# EAGLE board Qwiic_Shield_for_Teensy_Extended-Panel (EAGLE 9.6.2), part 1 of 2
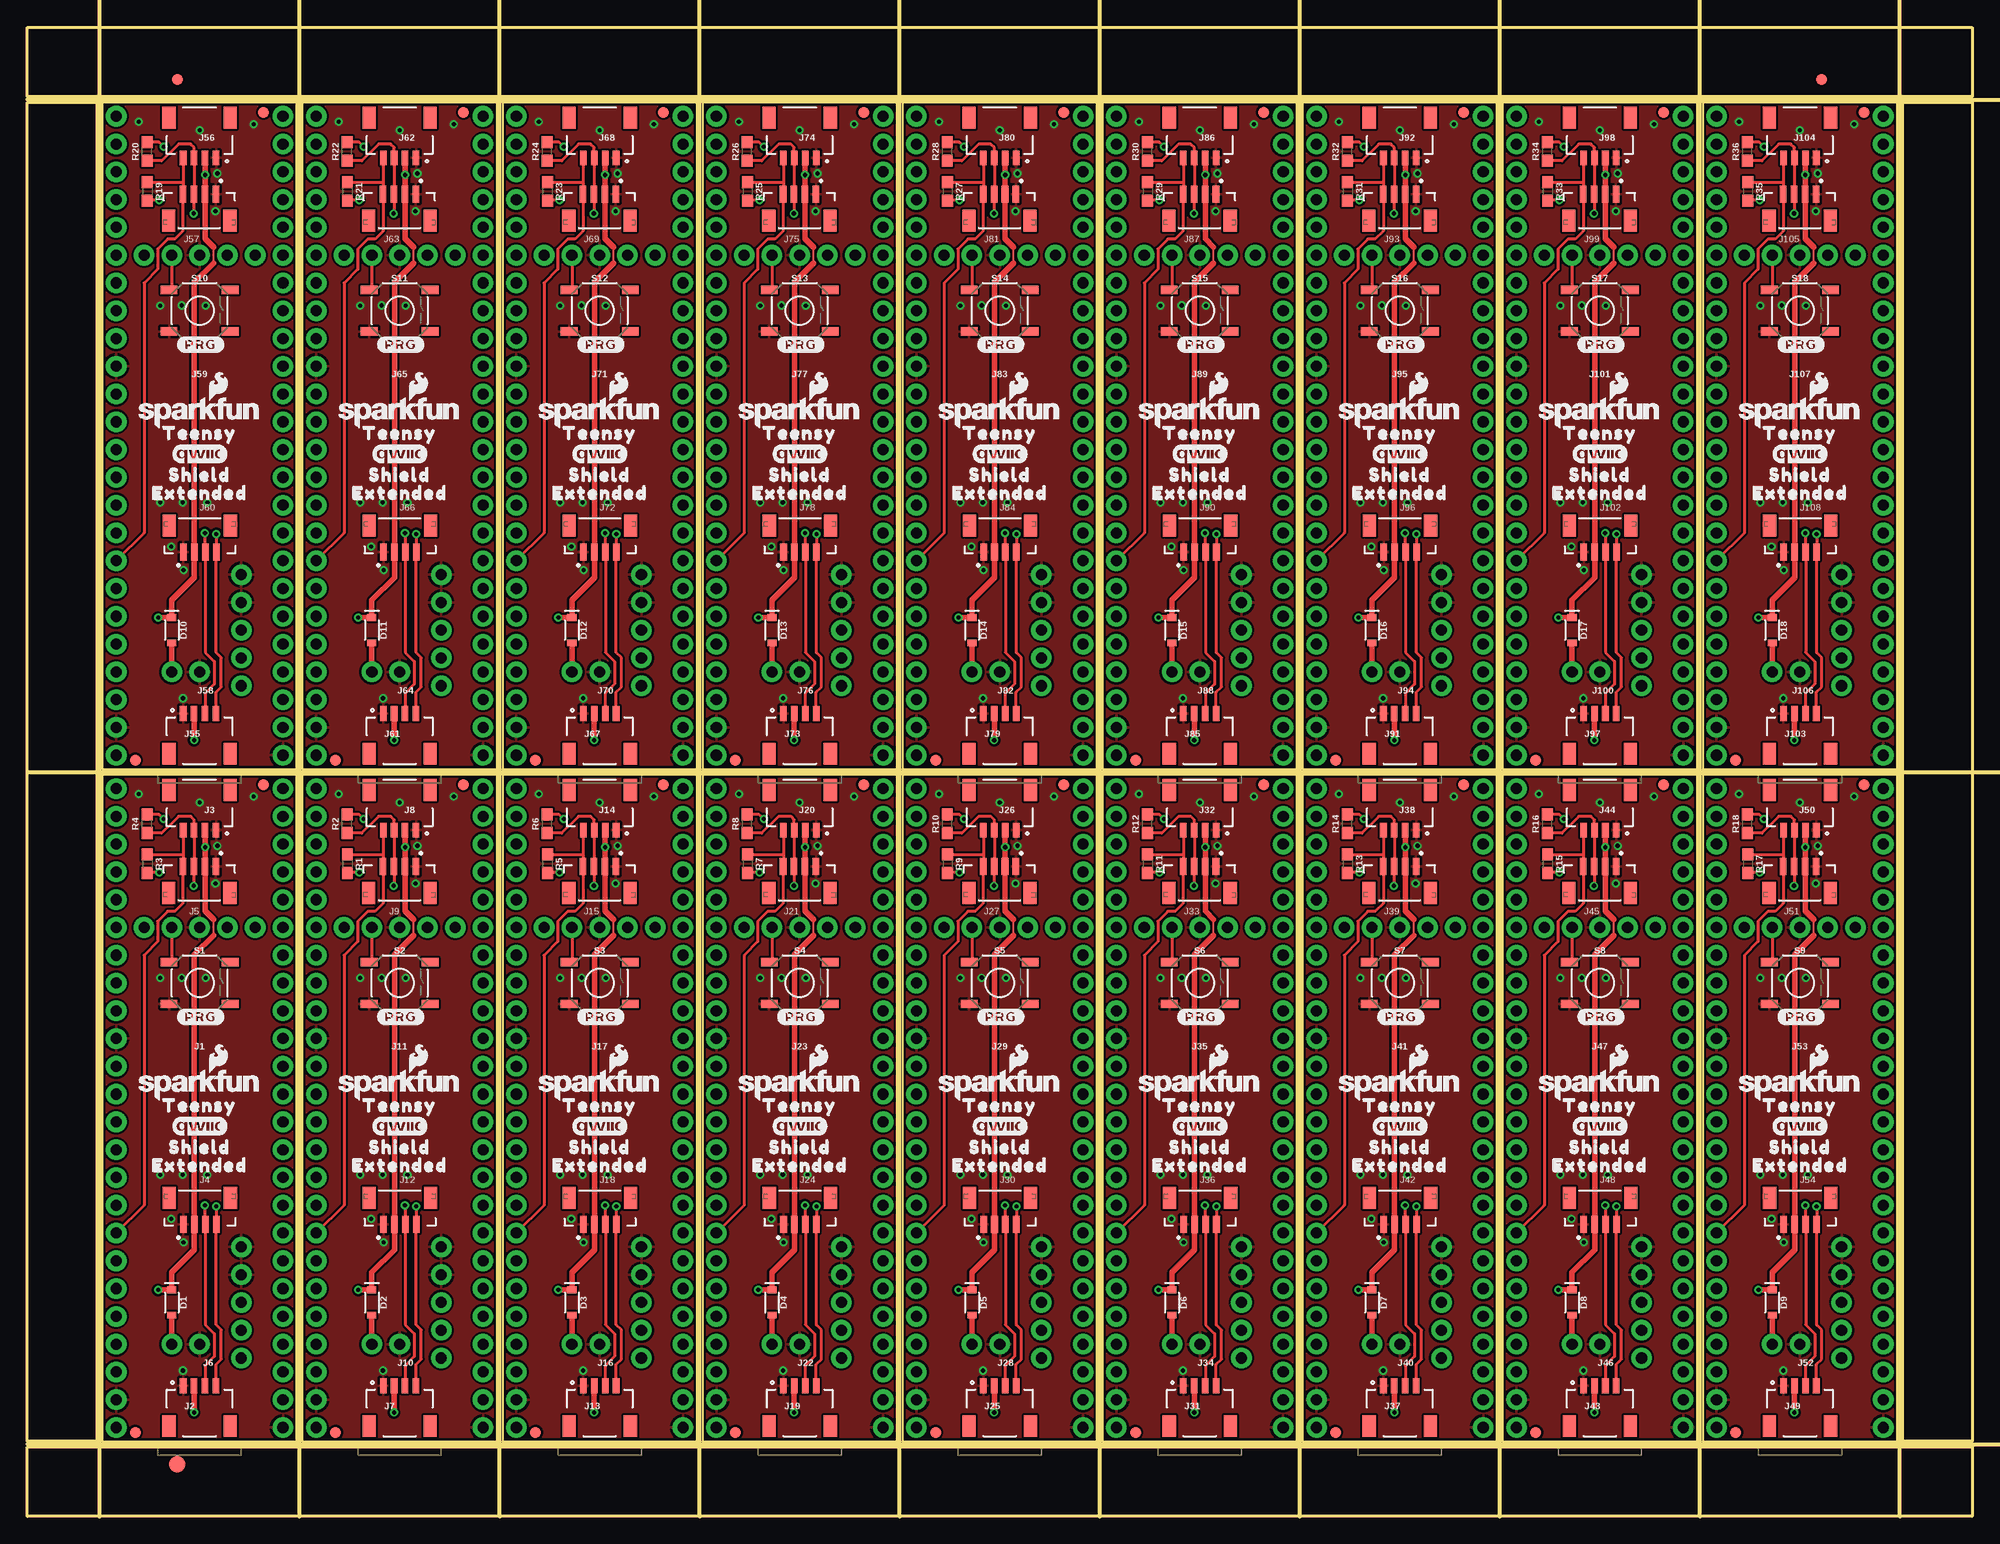
[diagram p0: board, top side]
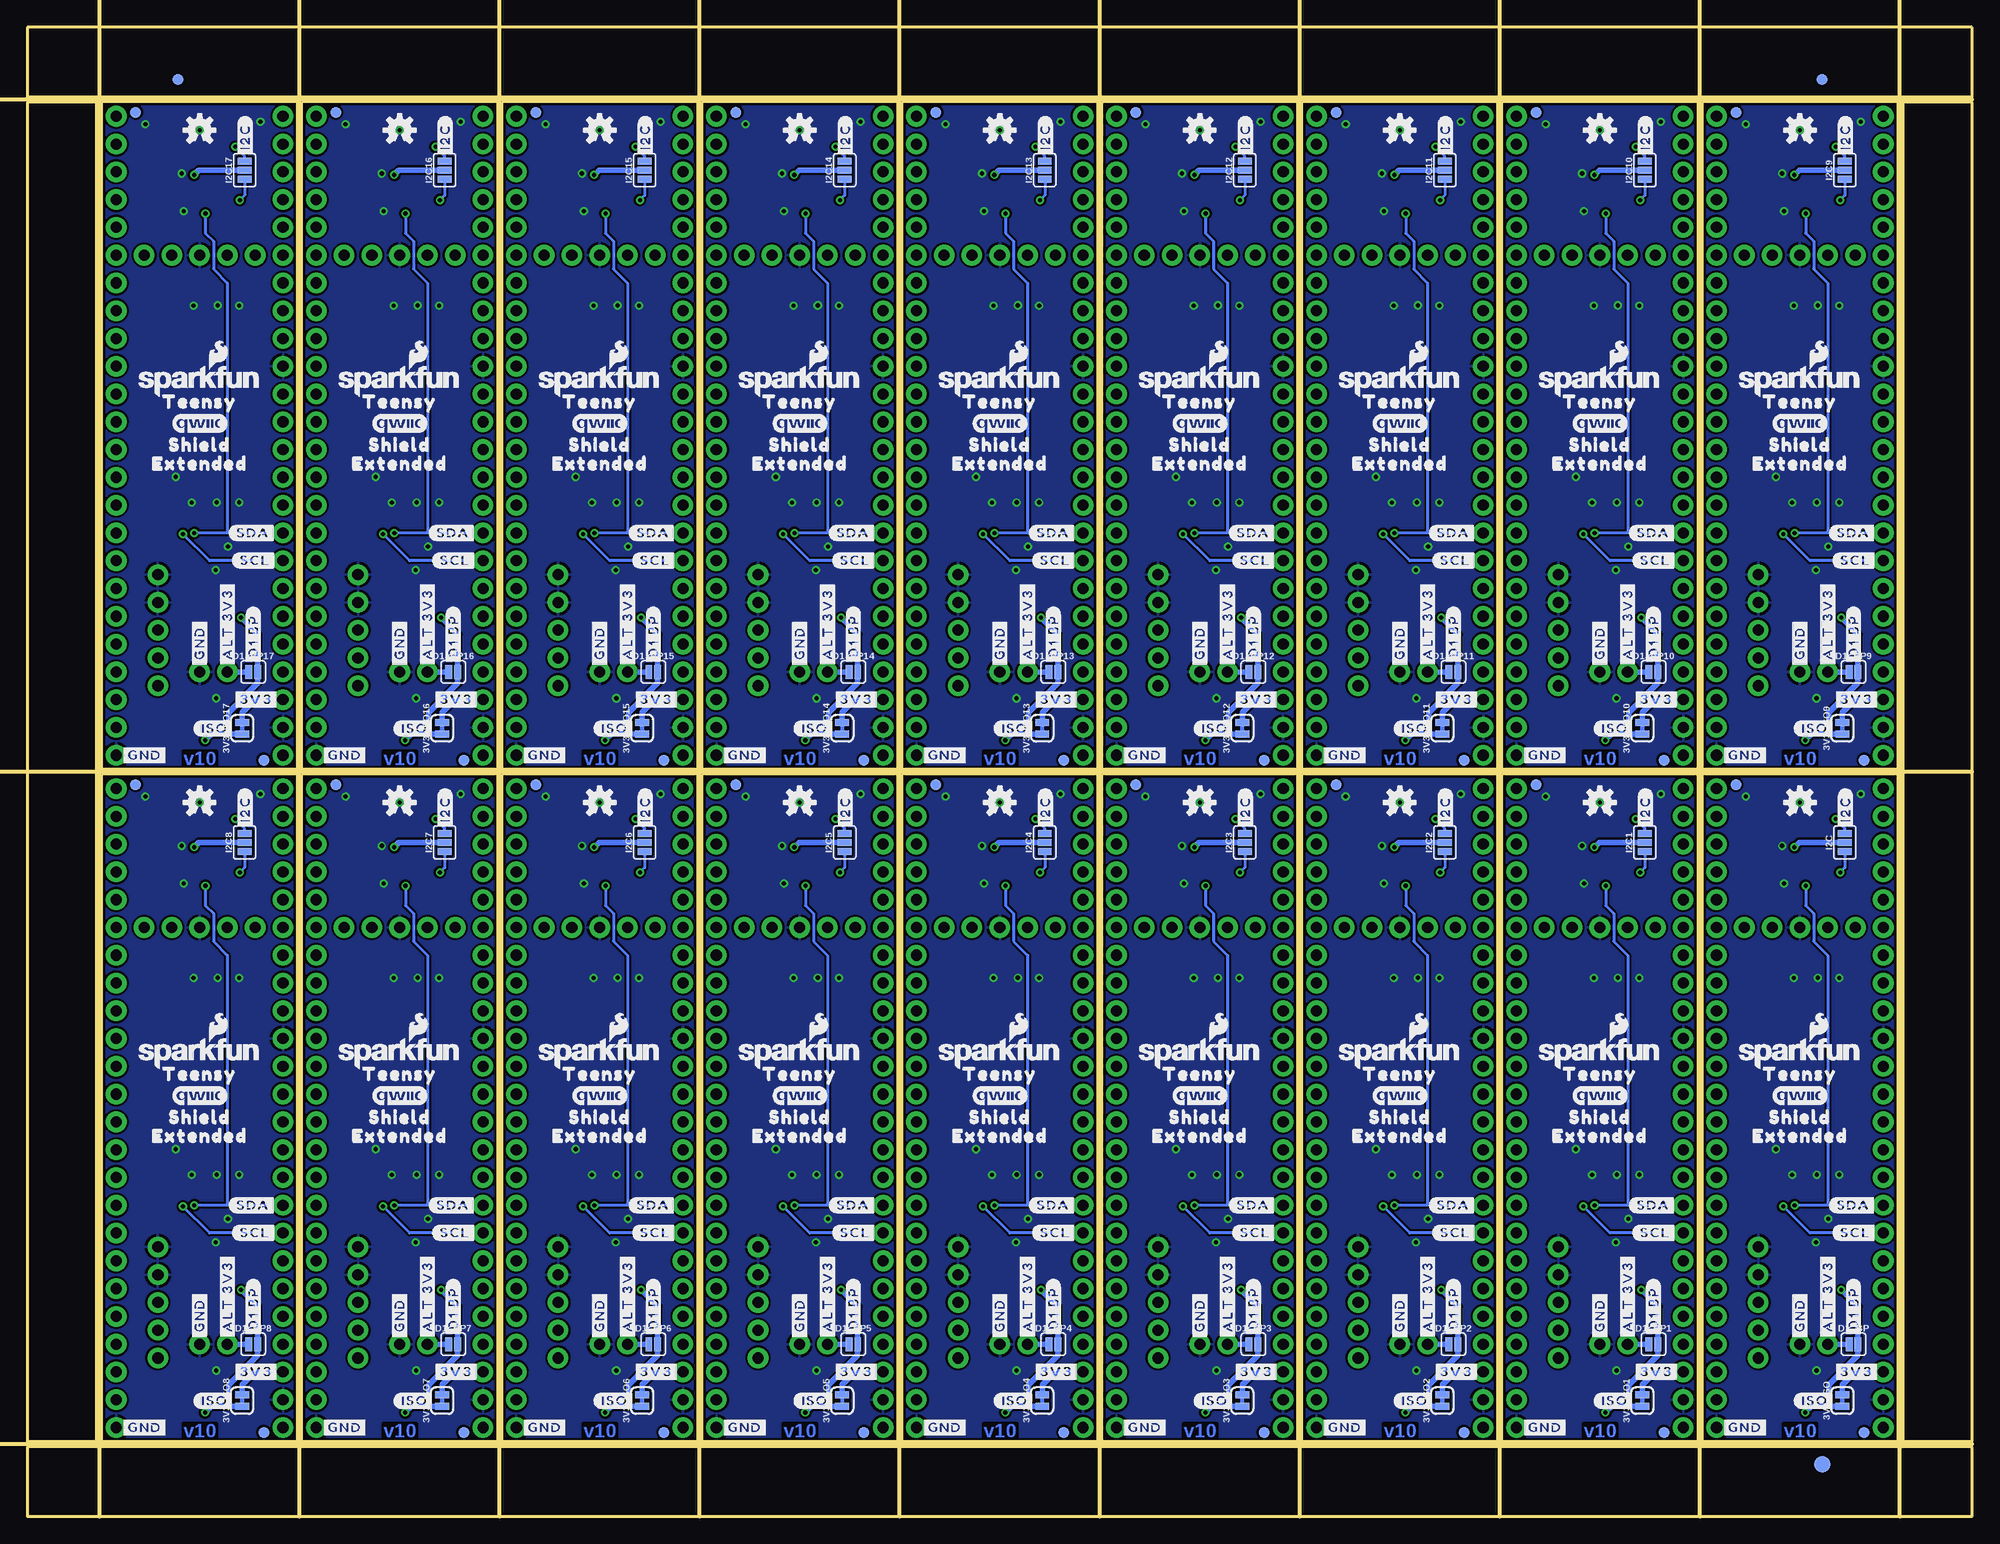
[diagram p1: board, bottom side, seen from below]

Size 177.8 x 136.14 mm. Coordinates in mm from the lower left corner, seen from the top.
Outline: 6.86,6.86 24.64,6.86 24.64,67.82 6.86,67.82 6.86,6.86
Outline: 25.15,6.86 42.93,6.86 42.93,67.82 25.15,67.82 25.15,6.86
Outline: 43.43,6.86 61.21,6.86 61.21,67.82 43.43,67.82 43.43,6.86
Outline: 61.72,6.86 79.5,6.86 79.5,67.82 61.72,67.82 61.72,6.86
Outline: 80.01,6.86 97.79,6.86 97.79,67.82 80.01,67.82 80.01,6.86
Outline: 98.3,6.86 116.08,6.86 116.08,67.82 98.3,67.82 98.3,6.86
Outline: 116.59,6.86 134.37,6.86 134.37,67.82 116.59,67.82 116.59,6.86
Outline: 134.87,6.86 152.65,6.86 152.65,67.82 134.87,67.82 134.87,6.86
Outline: 153.16,6.86 170.94,6.86 170.94,67.82 153.16,67.82 153.16,6.86
Outline: 6.86,68.33 24.64,68.33 24.64,129.29 6.86,129.29 6.86,68.33
Outline: 25.15,68.33 42.93,68.33 42.93,129.29 25.15,129.29 25.15,68.33
Outline: 43.43,68.33 61.21,68.33 61.21,129.29 43.43,129.29 43.43,68.33
Outline: 61.72,68.33 79.5,68.33 79.5,129.29 61.72,129.29 61.72,68.33
Outline: 80.01,68.33 97.79,68.33 97.79,129.29 80.01,129.29 80.01,68.33
Outline: 98.3,68.33 116.08,68.33 116.08,129.29 98.3,129.29 98.3,68.33
Outline: 116.59,68.33 134.37,68.33 134.37,129.29 116.59,129.29 116.59,68.33
Outline: 134.87,68.33 152.65,68.33 152.65,129.29 134.87,129.29 134.87,68.33
Outline: 153.16,68.33 170.94,68.33 170.94,129.29 153.16,129.29 153.16,68.33
Outline: 0,6.35 177.8,6.35 177.8,0 0,0 0,6.35
Outline: 171.45,129.29 177.8,129.29 177.8,6.86 171.45,6.86 171.45,129.29
Outline: 0,136.14 177.8,136.14 177.8,129.79 0,129.79 0,136.14
Outline: 0,129.29 6.35,129.29 6.35,6.86 0,6.86 0,129.29
Copper layers (1*16): Top 0.035mm / dielectric 1.5mm / Bottom 0.035mm
Design rules "Qwiic_Shield_for_Teensy_Extended": minimum track width 7mil, minimum drill 15mil, track to track 7mil, track to pad 7mil, pad to pad 7mil, via to via 7mil, smd to smd 7mil, copper to edge 7mil, drill to drill 7mil, minimum pad ring 7mil, minimum via ring 7mil, stop-mask expansion 4mil, vias tented up to drill 25mil, thermal gap 10mil
Milling: 13 lines

## Footprints (pad centres in the part's own frame; a part is rotated, then mirrored left to right if it is on the bottom)
SMT-JUMPER_2_NC_TRACE_SILK = smd 0.66 x 1.27: 1 -0.521,0; 2 0.521,0
SOD-323 = smd 0.63 x 0.83: A 1.15,0; C -1.15,0
SMT-JUMPER_2_NO_SILK = smd 0.635 x 1.27: 1 -0.406,0; 2 0.406,0
FIDUCIAL-1X2 = smd 1 x 1: 1 0,0
FIDUCIAL-1.5X3 = smd 1.5 x 1.5: 1 0,0
SMT-JUMPER_3_NO_SILK = smd 0.635 x 1.27: 1 -0.813,0; 2 0,0; 3 0.813,0
TEENSY_EXTENDED_NO_SILK = drill 1.016 pad 1.88: 0 7.62,-13.97; 1 7.62,-11.43; 2 7.62,-8.89; 3 7.62,-6.35; 3.3V@1 7.62,19.05; 3.3V@2 2.54,29.21; 3V -7.62,-11.43; 4 7.62,-3.81; 5 7.62,-1.27; 5V 3.81,-10.16; 6 7.62,1.27; 7 7.62,3.81; 8 7.62,6.35; 9 7.62,8.89; 10 7.62,11.43; 11 7.62,13.97; 12 7.62,16.51; 13 -7.62,16.51; 14 -7.62,13.97; 15 -7.62,11.43; 16 -7.62,8.89; 17 -7.62,6.35; 18 -7.62,3.81; 19 -7.62,1.27; 20 -7.62,-1.27; 21 -7.62,-3.81; 22 -7.62,-6.35; 23 -7.62,-8.89; 24 7.62,21.59; 25 7.62,24.13; 26 7.62,26.67; 27 7.62,29.21; 28 7.62,31.75; 29 7.62,34.29; 30 7.62,36.83; 31 7.62,39.37; 32 7.62,41.91; 33 -7.62,41.91; 34 -7.62,39.37; 35 -7.62,36.83; 36 -7.62,34.29; 37 -7.62,31.75; 38 -7.62,29.21; 39 -7.62,26.67; 40 -7.62,24.13; 41 -7.62,21.59; AGND -7.62,-13.97; D+ 3.81,-5.08; D- 3.81,-7.62; GND 0,29.21; GND1 7.62,-16.51; GND2 -7.62,19.05; GND3 3.81,-2.54; GND4 3.81,0; PROG -2.54,29.21; R -5.08,29.21; VBAT 5.08,29.21; VIN -7.62,-16.51
JST04_1MM_RA = smd 0.6 x 1.35: 1 -1.5,0; 2 -0.5,0; 3 0.5,0; 4 1.5,0 | smd 1.2 x 2: NC1 2.8,-3.675; NC2 -2.8,-3.675
JST04_1MM_VERT = smd 0.6 x 1.55: 1 -1.478,0.775; 2 -0.478,0.775; 3 0.522,0.775; 4 1.522,0.775 | smd 1.2 x 2: NC1 -2.778,3.2; NC2 2.822,3.2
1X02_NO_SILK = drill 1.016 pad 1.88: 1 0,0; 2 2.54,0
0603 = smd 1.1 x 1: 1 -0.85,0; 2 0.85,0
TACTILE_SWITCH_SMD_5.2MM = smd 1.524 x 0.762: 1 -2.794,1.905; 2 2.794,1.905; 3 -2.794,-1.905; 4 2.794,-1.905

## Placement (x,y rotation side)
3V3_ISO  [SMT-JUMPER_2_NC_TRACE_SILK]  11.86,10.59 90 bottom
3V3_ISO1  [SMT-JUMPER_2_NC_TRACE_SILK]  30.15,10.59 90 bottom
3V3_ISO2  [SMT-JUMPER_2_NC_TRACE_SILK]  48.44,10.59 90 bottom
3V3_ISO3  [SMT-JUMPER_2_NC_TRACE_SILK]  66.73,10.59 90 bottom
3V3_ISO4  [SMT-JUMPER_2_NC_TRACE_SILK]  85.01,10.59 90 bottom
3V3_ISO5  [SMT-JUMPER_2_NC_TRACE_SILK]  103.3,10.59 90 bottom
3V3_ISO6  [SMT-JUMPER_2_NC_TRACE_SILK]  121.59,10.59 90 bottom
3V3_ISO7  [SMT-JUMPER_2_NC_TRACE_SILK]  139.88,10.59 90 bottom
3V3_ISO8  [SMT-JUMPER_2_NC_TRACE_SILK]  158.17,10.59 90 bottom
3V3_ISO9  [SMT-JUMPER_2_NC_TRACE_SILK]  11.86,72.06 90 bottom
3V3_ISO10  [SMT-JUMPER_2_NC_TRACE_SILK]  30.15,72.06 90 bottom
3V3_ISO11  [SMT-JUMPER_2_NC_TRACE_SILK]  48.44,72.06 90 bottom
3V3_ISO12  [SMT-JUMPER_2_NC_TRACE_SILK]  66.73,72.06 90 bottom
3V3_ISO13  [SMT-JUMPER_2_NC_TRACE_SILK]  85.01,72.06 90 bottom
3V3_ISO14  [SMT-JUMPER_2_NC_TRACE_SILK]  103.3,72.06 90 bottom
3V3_ISO15  [SMT-JUMPER_2_NC_TRACE_SILK]  121.59,72.06 90 bottom
3V3_ISO16  [SMT-JUMPER_2_NC_TRACE_SILK]  139.88,72.06 90 bottom
3V3_ISO17  [SMT-JUMPER_2_NC_TRACE_SILK]  158.17,72.06 90 bottom
D1  3A/10V/280mV  [SOD-323]  13.21,19.56 270 top
D1_BP  [SMT-JUMPER_2_NO_SILK]  10.85,15.75 0 bottom
D1_BP1  [SMT-JUMPER_2_NO_SILK]  29.13,15.75 0 bottom
D1_BP2  [SMT-JUMPER_2_NO_SILK]  47.42,15.75 0 bottom
D1_BP3  [SMT-JUMPER_2_NO_SILK]  65.71,15.75 0 bottom
D1_BP4  [SMT-JUMPER_2_NO_SILK]  84,15.75 0 bottom
D1_BP5  [SMT-JUMPER_2_NO_SILK]  102.29,15.75 0 bottom
D1_BP6  [SMT-JUMPER_2_NO_SILK]  120.57,15.75 0 bottom
D1_BP7  [SMT-JUMPER_2_NO_SILK]  138.86,15.75 0 bottom
D1_BP8  [SMT-JUMPER_2_NO_SILK]  157.15,15.75 0 bottom
D1_BP9  [SMT-JUMPER_2_NO_SILK]  10.85,77.22 0 bottom
D1_BP10  [SMT-JUMPER_2_NO_SILK]  29.13,77.22 0 bottom
D1_BP11  [SMT-JUMPER_2_NO_SILK]  47.42,77.22 0 bottom
D1_BP12  [SMT-JUMPER_2_NO_SILK]  65.71,77.22 0 bottom
D1_BP13  [SMT-JUMPER_2_NO_SILK]  84,77.22 0 bottom
D1_BP14  [SMT-JUMPER_2_NO_SILK]  102.29,77.22 0 bottom
D1_BP15  [SMT-JUMPER_2_NO_SILK]  120.57,77.22 0 bottom
D1_BP16  [SMT-JUMPER_2_NO_SILK]  138.86,77.22 0 bottom
D1_BP17  [SMT-JUMPER_2_NO_SILK]  157.15,77.22 0 bottom
D2  3A/10V/280mV  [SOD-323]  31.5,19.56 270 top
D3  3A/10V/280mV  [SOD-323]  49.78,19.56 270 top
D4  3A/10V/280mV  [SOD-323]  68.07,19.56 270 top
D5  3A/10V/280mV  [SOD-323]  86.36,19.56 270 top
D6  3A/10V/280mV  [SOD-323]  104.65,19.56 270 top
D7  3A/10V/280mV  [SOD-323]  122.94,19.56 270 top
D8  3A/10V/280mV  [SOD-323]  141.22,19.56 270 top
D9  3A/10V/280mV  [SOD-323]  159.51,19.56 270 top
D10  3A/10V/280mV  [SOD-323]  13.21,81.03 270 top
D11  3A/10V/280mV  [SOD-323]  31.5,81.03 270 top
D12  3A/10V/280mV  [SOD-323]  49.78,81.03 270 top
D13  3A/10V/280mV  [SOD-323]  68.07,81.03 270 top
D14  3A/10V/280mV  [SOD-323]  86.36,81.03 270 top
D15  3A/10V/280mV  [SOD-323]  104.65,81.03 270 top
D16  3A/10V/280mV  [SOD-323]  122.94,81.03 270 top
D17  3A/10V/280mV  [SOD-323]  141.22,81.03 270 top
D18  3A/10V/280mV  [SOD-323]  159.51,81.03 270 top
E$1  [FIDUCIAL-1X2]  13.72,131.38 0 top
E$2  [FIDUCIAL-1X2]  13.72,131.38 0 bottom
E$3  [FIDUCIAL-1X2]  164.02,131.38 0 top
E$4  [FIDUCIAL-1X2]  164.02,131.38 0 bottom
E$5  [FIDUCIAL-1.5X3]  13.72,4.76 0 top
E$6  [FIDUCIAL-1.5X3]  13.72,4.76 0 bottom
FD1  FIDUCIAL1X2  [FIDUCIAL-1X2]  9.88,7.67 0 top
FD2  FIDUCIAL1X2  [FIDUCIAL-1X2]  9.88,7.67 0 bottom
FD3  FIDUCIAL1X2  [FIDUCIAL-1X2]  21.59,66.9 0 top
FD4  FIDUCIAL1X2  [FIDUCIAL-1X2]  21.59,66.9 0 bottom
FD5  FIDUCIAL1X2  [FIDUCIAL-1X2]  28.17,7.67 0 top
FD6  FIDUCIAL1X2  [FIDUCIAL-1X2]  28.17,7.67 0 bottom
FD7  FIDUCIAL1X2  [FIDUCIAL-1X2]  39.88,66.9 0 top
FD8  FIDUCIAL1X2  [FIDUCIAL-1X2]  39.88,66.9 0 bottom
FD9  FIDUCIAL1X2  [FIDUCIAL-1X2]  46.46,7.67 0 top
FD10  FIDUCIAL1X2  [FIDUCIAL-1X2]  46.46,7.67 0 bottom
FD11  FIDUCIAL1X2  [FIDUCIAL-1X2]  58.17,66.9 0 top
FD12  FIDUCIAL1X2  [FIDUCIAL-1X2]  58.17,66.9 0 bottom
FD13  FIDUCIAL1X2  [FIDUCIAL-1X2]  64.74,7.67 0 top
FD14  FIDUCIAL1X2  [FIDUCIAL-1X2]  64.74,7.67 0 bottom
FD15  FIDUCIAL1X2  [FIDUCIAL-1X2]  76.45,66.9 0 top
FD16  FIDUCIAL1X2  [FIDUCIAL-1X2]  76.45,66.9 0 bottom
FD17  FIDUCIAL1X2  [FIDUCIAL-1X2]  83.03,7.67 0 top
FD18  FIDUCIAL1X2  [FIDUCIAL-1X2]  83.03,7.67 0 bottom
FD19  FIDUCIAL1X2  [FIDUCIAL-1X2]  94.74,66.9 0 top
FD20  FIDUCIAL1X2  [FIDUCIAL-1X2]  94.74,66.9 0 bottom
FD21  FIDUCIAL1X2  [FIDUCIAL-1X2]  101.32,7.67 0 top
FD22  FIDUCIAL1X2  [FIDUCIAL-1X2]  101.32,7.67 0 bottom
FD23  FIDUCIAL1X2  [FIDUCIAL-1X2]  113.03,66.9 0 top
FD24  FIDUCIAL1X2  [FIDUCIAL-1X2]  113.03,66.9 0 bottom
FD25  FIDUCIAL1X2  [FIDUCIAL-1X2]  119.61,7.67 0 top
FD26  FIDUCIAL1X2  [FIDUCIAL-1X2]  119.61,7.67 0 bottom
FD27  FIDUCIAL1X2  [FIDUCIAL-1X2]  131.32,66.9 0 top
FD28  FIDUCIAL1X2  [FIDUCIAL-1X2]  131.32,66.9 0 bottom
FD29  FIDUCIAL1X2  [FIDUCIAL-1X2]  137.9,7.67 0 top
FD30  FIDUCIAL1X2  [FIDUCIAL-1X2]  137.9,7.67 0 bottom
FD31  FIDUCIAL1X2  [FIDUCIAL-1X2]  149.61,66.9 0 top
FD32  FIDUCIAL1X2  [FIDUCIAL-1X2]  149.61,66.9 0 bottom
FD33  FIDUCIAL1X2  [FIDUCIAL-1X2]  156.18,7.67 0 top
FD34  FIDUCIAL1X2  [FIDUCIAL-1X2]  156.18,7.67 0 bottom
FD35  FIDUCIAL1X2  [FIDUCIAL-1X2]  167.89,66.9 0 top
FD36  FIDUCIAL1X2  [FIDUCIAL-1X2]  167.89,66.9 0 bottom
FD37  FIDUCIAL1X2  [FIDUCIAL-1X2]  9.88,69.14 0 top
FD38  FIDUCIAL1X2  [FIDUCIAL-1X2]  9.88,69.14 0 bottom
FD39  FIDUCIAL1X2  [FIDUCIAL-1X2]  21.59,128.37 0 top
FD40  FIDUCIAL1X2  [FIDUCIAL-1X2]  21.59,128.37 0 bottom
FD41  FIDUCIAL1X2  [FIDUCIAL-1X2]  28.17,69.14 0 top
FD42  FIDUCIAL1X2  [FIDUCIAL-1X2]  28.17,69.14 0 bottom
FD43  FIDUCIAL1X2  [FIDUCIAL-1X2]  39.88,128.37 0 top
FD44  FIDUCIAL1X2  [FIDUCIAL-1X2]  39.88,128.37 0 bottom
FD45  FIDUCIAL1X2  [FIDUCIAL-1X2]  46.46,69.14 0 top
FD46  FIDUCIAL1X2  [FIDUCIAL-1X2]  46.46,69.14 0 bottom
FD47  FIDUCIAL1X2  [FIDUCIAL-1X2]  58.17,128.37 0 top
FD48  FIDUCIAL1X2  [FIDUCIAL-1X2]  58.17,128.37 0 bottom
FD49  FIDUCIAL1X2  [FIDUCIAL-1X2]  64.74,69.14 0 top
FD50  FIDUCIAL1X2  [FIDUCIAL-1X2]  64.74,69.14 0 bottom
FD51  FIDUCIAL1X2  [FIDUCIAL-1X2]  76.45,128.37 0 top
FD52  FIDUCIAL1X2  [FIDUCIAL-1X2]  76.45,128.37 0 bottom
FD53  FIDUCIAL1X2  [FIDUCIAL-1X2]  83.03,69.14 0 top
FD54  FIDUCIAL1X2  [FIDUCIAL-1X2]  83.03,69.14 0 bottom
FD55  FIDUCIAL1X2  [FIDUCIAL-1X2]  94.74,128.37 0 top
FD56  FIDUCIAL1X2  [FIDUCIAL-1X2]  94.74,128.37 0 bottom
FD57  FIDUCIAL1X2  [FIDUCIAL-1X2]  101.32,69.14 0 top
FD58  FIDUCIAL1X2  [FIDUCIAL-1X2]  101.32,69.14 0 bottom
FD59  FIDUCIAL1X2  [FIDUCIAL-1X2]  113.03,128.37 0 top
FD60  FIDUCIAL1X2  [FIDUCIAL-1X2]  113.03,128.37 0 bottom
FD61  FIDUCIAL1X2  [FIDUCIAL-1X2]  119.61,69.14 0 top
FD62  FIDUCIAL1X2  [FIDUCIAL-1X2]  119.61,69.14 0 bottom
FD63  FIDUCIAL1X2  [FIDUCIAL-1X2]  131.32,128.37 0 top
FD64  FIDUCIAL1X2  [FIDUCIAL-1X2]  131.32,128.37 0 bottom
FD65  FIDUCIAL1X2  [FIDUCIAL-1X2]  137.9,69.14 0 top
FD66  FIDUCIAL1X2  [FIDUCIAL-1X2]  137.9,69.14 0 bottom
FD67  FIDUCIAL1X2  [FIDUCIAL-1X2]  149.61,128.37 0 top
FD68  FIDUCIAL1X2  [FIDUCIAL-1X2]  149.61,128.37 0 bottom
FD69  FIDUCIAL1X2  [FIDUCIAL-1X2]  156.18,69.14 0 top
FD70  FIDUCIAL1X2  [FIDUCIAL-1X2]  156.18,69.14 0 bottom
FD71  FIDUCIAL1X2  [FIDUCIAL-1X2]  167.89,128.37 0 top
FD72  FIDUCIAL1X2  [FIDUCIAL-1X2]  167.89,128.37 0 bottom
I2C  JUMPER-SMT_3_NO_SILK  [SMT-JUMPER_3_NO_SILK]  11.63,61.62 90 bottom
I2C1  JUMPER-SMT_3_NO_SILK  [SMT-JUMPER_3_NO_SILK]  29.92,61.62 90 bottom
I2C2  JUMPER-SMT_3_NO_SILK  [SMT-JUMPER_3_NO_SILK]  48.21,61.62 90 bottom
I2C3  JUMPER-SMT_3_NO_SILK  [SMT-JUMPER_3_NO_SILK]  66.5,61.62 90 bottom
I2C4  JUMPER-SMT_3_NO_SILK  [SMT-JUMPER_3_NO_SILK]  84.79,61.62 90 bottom
I2C5  JUMPER-SMT_3_NO_SILK  [SMT-JUMPER_3_NO_SILK]  103.07,61.62 90 bottom
I2C6  JUMPER-SMT_3_NO_SILK  [SMT-JUMPER_3_NO_SILK]  121.36,61.62 90 bottom
I2C7  JUMPER-SMT_3_NO_SILK  [SMT-JUMPER_3_NO_SILK]  139.65,61.62 90 bottom
I2C8  JUMPER-SMT_3_NO_SILK  [SMT-JUMPER_3_NO_SILK]  157.94,61.62 90 bottom
I2C9  JUMPER-SMT_3_NO_SILK  [SMT-JUMPER_3_NO_SILK]  11.63,123.09 90 bottom
I2C10  JUMPER-SMT_3_NO_SILK  [SMT-JUMPER_3_NO_SILK]  29.92,123.09 90 bottom
I2C11  JUMPER-SMT_3_NO_SILK  [SMT-JUMPER_3_NO_SILK]  48.21,123.09 90 bottom
I2C12  JUMPER-SMT_3_NO_SILK  [SMT-JUMPER_3_NO_SILK]  66.5,123.09 90 bottom
I2C13  JUMPER-SMT_3_NO_SILK  [SMT-JUMPER_3_NO_SILK]  84.79,123.09 90 bottom
I2C14  JUMPER-SMT_3_NO_SILK  [SMT-JUMPER_3_NO_SILK]  103.07,123.09 90 bottom
I2C15  JUMPER-SMT_3_NO_SILK  [SMT-JUMPER_3_NO_SILK]  121.36,123.09 90 bottom
I2C16  JUMPER-SMT_3_NO_SILK  [SMT-JUMPER_3_NO_SILK]  139.65,123.09 90 bottom
I2C17  JUMPER-SMT_3_NO_SILK  [SMT-JUMPER_3_NO_SILK]  157.94,123.09 90 bottom
J1  TEENSY_EXTENDED  [TEENSY_EXTENDED_NO_SILK]  15.75,24.64 0 top
J2  QWIIC_RA  [JST04_1MM_RA]  15.75,11.94 0 top
J3  QWIIC_RA  [JST04_1MM_RA]  15.75,62.74 180 top
J4  QWIIC_Vertical  [JST04_1MM_VERT]  15.75,25.91 0 top
J5  QWIIC_Vertical  [JST04_1MM_VERT]  15.75,60.2 180 top
J6  ALT PWR  [1X02_NO_SILK]  15.75,15.75 180 top
J7  QWIIC_RA  [JST04_1MM_RA]  34.04,11.94 0 top
J8  QWIIC_RA  [JST04_1MM_RA]  34.04,62.74 180 top
J9  QWIIC_Vertical  [JST04_1MM_VERT]  34.04,60.2 180 top
J10  ALT PWR  [1X02_NO_SILK]  34.04,15.75 180 top
J11  TEENSY_EXTENDED  [TEENSY_EXTENDED_NO_SILK]  34.04,24.64 0 top
J12  QWIIC_Vertical  [JST04_1MM_VERT]  34.04,25.91 0 top
J13  QWIIC_RA  [JST04_1MM_RA]  52.32,11.94 0 top
J14  QWIIC_RA  [JST04_1MM_RA]  52.32,62.74 180 top
J15  QWIIC_Vertical  [JST04_1MM_VERT]  52.32,60.2 180 top
J16  ALT PWR  [1X02_NO_SILK]  52.32,15.75 180 top
J17  TEENSY_EXTENDED  [TEENSY_EXTENDED_NO_SILK]  52.32,24.64 0 top
J18  QWIIC_Vertical  [JST04_1MM_VERT]  52.32,25.91 0 top
J19  QWIIC_RA  [JST04_1MM_RA]  70.61,11.94 0 top
J20  QWIIC_RA  [JST04_1MM_RA]  70.61,62.74 180 top
J21  QWIIC_Vertical  [JST04_1MM_VERT]  70.61,60.2 180 top
J22  ALT PWR  [1X02_NO_SILK]  70.61,15.75 180 top
J23  TEENSY_EXTENDED  [TEENSY_EXTENDED_NO_SILK]  70.61,24.64 0 top
J24  QWIIC_Vertical  [JST04_1MM_VERT]  70.61,25.91 0 top
J25  QWIIC_RA  [JST04_1MM_RA]  88.9,11.94 0 top
J26  QWIIC_RA  [JST04_1MM_RA]  88.9,62.74 180 top
J27  QWIIC_Vertical  [JST04_1MM_VERT]  88.9,60.2 180 top
J28  ALT PWR  [1X02_NO_SILK]  88.9,15.75 180 top
J29  TEENSY_EXTENDED  [TEENSY_EXTENDED_NO_SILK]  88.9,24.64 0 top
J30  QWIIC_Vertical  [JST04_1MM_VERT]  88.9,25.91 0 top
J31  QWIIC_RA  [JST04_1MM_RA]  107.19,11.94 0 top
J32  QWIIC_RA  [JST04_1MM_RA]  107.19,62.74 180 top
J33  QWIIC_Vertical  [JST04_1MM_VERT]  107.19,60.2 180 top
J34  ALT PWR  [1X02_NO_SILK]  107.19,15.75 180 top
J35  TEENSY_EXTENDED  [TEENSY_EXTENDED_NO_SILK]  107.19,24.64 0 top
J36  QWIIC_Vertical  [JST04_1MM_VERT]  107.19,25.91 0 top
J37  QWIIC_RA  [JST04_1MM_RA]  125.48,11.94 0 top
J38  QWIIC_RA  [JST04_1MM_RA]  125.48,62.74 180 top
J39  QWIIC_Vertical  [JST04_1MM_VERT]  125.48,60.2 180 top
J40  ALT PWR  [1X02_NO_SILK]  125.48,15.75 180 top
J41  TEENSY_EXTENDED  [TEENSY_EXTENDED_NO_SILK]  125.48,24.64 0 top
J42  QWIIC_Vertical  [JST04_1MM_VERT]  125.48,25.91 0 top
J43  QWIIC_RA  [JST04_1MM_RA]  143.76,11.94 0 top
J44  QWIIC_RA  [JST04_1MM_RA]  143.76,62.74 180 top
J45  QWIIC_Vertical  [JST04_1MM_VERT]  143.76,60.2 180 top
J46  ALT PWR  [1X02_NO_SILK]  143.76,15.75 180 top
J47  TEENSY_EXTENDED  [TEENSY_EXTENDED_NO_SILK]  143.76,24.64 0 top
J48  QWIIC_Vertical  [JST04_1MM_VERT]  143.76,25.91 0 top
J49  QWIIC_RA  [JST04_1MM_RA]  162.05,11.94 0 top
J50  QWIIC_RA  [JST04_1MM_RA]  162.05,62.74 180 top
J51  QWIIC_Vertical  [JST04_1MM_VERT]  162.05,60.2 180 top
J52  ALT PWR  [1X02_NO_SILK]  162.05,15.75 180 top
J53  TEENSY_EXTENDED  [TEENSY_EXTENDED_NO_SILK]  162.05,24.64 0 top
J54  QWIIC_Vertical  [JST04_1MM_VERT]  162.05,25.91 0 top
J55  QWIIC_RA  [JST04_1MM_RA]  15.75,73.41 0 top
J56  QWIIC_RA  [JST04_1MM_RA]  15.75,124.21 180 top
J57  QWIIC_Vertical  [JST04_1MM_VERT]  15.75,121.67 180 top
J58  ALT PWR  [1X02_NO_SILK]  15.75,77.22 180 top
J59  TEENSY_EXTENDED  [TEENSY_EXTENDED_NO_SILK]  15.75,86.11 0 top
J60  QWIIC_Vertical  [JST04_1MM_VERT]  15.75,87.38 0 top
J61  QWIIC_RA  [JST04_1MM_RA]  34.04,73.41 0 top
J62  QWIIC_RA  [JST04_1MM_RA]  34.04,124.21 180 top
J63  QWIIC_Vertical  [JST04_1MM_VERT]  34.04,121.67 180 top
J64  ALT PWR  [1X02_NO_SILK]  34.04,77.22 180 top
J65  TEENSY_EXTENDED  [TEENSY_EXTENDED_NO_SILK]  34.04,86.11 0 top
J66  QWIIC_Vertical  [JST04_1MM_VERT]  34.04,87.38 0 top
J67  QWIIC_RA  [JST04_1MM_RA]  52.32,73.41 0 top
J68  QWIIC_RA  [JST04_1MM_RA]  52.32,124.21 180 top
J69  QWIIC_Vertical  [JST04_1MM_VERT]  52.32,121.67 180 top
J70  ALT PWR  [1X02_NO_SILK]  52.32,77.22 180 top
J71  TEENSY_EXTENDED  [TEENSY_EXTENDED_NO_SILK]  52.32,86.11 0 top
J72  QWIIC_Vertical  [JST04_1MM_VERT]  52.32,87.38 0 top
J73  QWIIC_RA  [JST04_1MM_RA]  70.61,73.41 0 top
J74  QWIIC_RA  [JST04_1MM_RA]  70.61,124.21 180 top
J75  QWIIC_Vertical  [JST04_1MM_VERT]  70.61,121.67 180 top
J76  ALT PWR  [1X02_NO_SILK]  70.61,77.22 180 top
J77  TEENSY_EXTENDED  [TEENSY_EXTENDED_NO_SILK]  70.61,86.11 0 top
J78  QWIIC_Vertical  [JST04_1MM_VERT]  70.61,87.38 0 top
J79  QWIIC_RA  [JST04_1MM_RA]  88.9,73.41 0 top
J80  QWIIC_RA  [JST04_1MM_RA]  88.9,124.21 180 top
J81  QWIIC_Vertical  [JST04_1MM_VERT]  88.9,121.67 180 top
J82  ALT PWR  [1X02_NO_SILK]  88.9,77.22 180 top
J83  TEENSY_EXTENDED  [TEENSY_EXTENDED_NO_SILK]  88.9,86.11 0 top
J84  QWIIC_Vertical  [JST04_1MM_VERT]  88.9,87.38 0 top
J85  QWIIC_RA  [JST04_1MM_RA]  107.19,73.41 0 top
J86  QWIIC_RA  [JST04_1MM_RA]  107.19,124.21 180 top
J87  QWIIC_Vertical  [JST04_1MM_VERT]  107.19,121.67 180 top
J88  ALT PWR  [1X02_NO_SILK]  107.19,77.22 180 top
J89  TEENSY_EXTENDED  [TEENSY_EXTENDED_NO_SILK]  107.19,86.11 0 top
J90  QWIIC_Vertical  [JST04_1MM_VERT]  107.19,87.38 0 top
J91  QWIIC_RA  [JST04_1MM_RA]  125.48,73.41 0 top
J92  QWIIC_RA  [JST04_1MM_RA]  125.48,124.21 180 top
J93  QWIIC_Vertical  [JST04_1MM_VERT]  125.48,121.67 180 top
J94  ALT PWR  [1X02_NO_SILK]  125.48,77.22 180 top
J95  TEENSY_EXTENDED  [TEENSY_EXTENDED_NO_SILK]  125.48,86.11 0 top
J96  QWIIC_Vertical  [JST04_1MM_VERT]  125.48,87.38 0 top
J97  QWIIC_RA  [JST04_1MM_RA]  143.76,73.41 0 top
J98  QWIIC_RA  [JST04_1MM_RA]  143.76,124.21 180 top
J99  QWIIC_Vertical  [JST04_1MM_VERT]  143.76,121.67 180 top
J100  ALT PWR  [1X02_NO_SILK]  143.76,77.22 180 top
J101  TEENSY_EXTENDED  [TEENSY_EXTENDED_NO_SILK]  143.76,86.11 0 top
J102  QWIIC_Vertical  [JST04_1MM_VERT]  143.76,87.38 0 top
J103  QWIIC_RA  [JST04_1MM_RA]  162.05,73.41 0 top
J104  QWIIC_RA  [JST04_1MM_RA]  162.05,124.21 180 top
J105  QWIIC_Vertical  [JST04_1MM_VERT]  162.05,121.67 180 top
J106  ALT PWR  [1X02_NO_SILK]  162.05,77.22 180 top
J107  TEENSY_EXTENDED  [TEENSY_EXTENDED_NO_SILK]  162.05,86.11 0 top
J108  QWIIC_Vertical  [JST04_1MM_VERT]  162.05,87.38 0 top
LOGO1  SFE_LOGO_NAME_FLAME.1_INCH  [SFE_LOGO_NAME_FLAME_.1]  15.75,42.32 0 bottom
LOGO2  SFE_LOGO_NAME_FLAME.1_INCH  [SFE_LOGO_NAME_FLAME_.1]  15.75,39.45 0 top
LOGO3  OSHW-LOGOS  [OSHW-LOGO-S]  15.75,65.28 0 bottom
LOGO4  QWIIC_LOGO_5MM  [QWIIC_5MM]  15.75,35.69 0 top
LOGO5  QWIIC_LOGO_5MM  [QWIIC_5MM]  15.75,38.48 0 bottom
LOGO6  SFE_LOGO_NAME_FLAME.1_INCH  [SFE_LOGO_NAME_FLAME_.1]  34.04,42.32 0 bottom
LOGO7  OSHW-LOGOS  [OSHW-LOGO-S]  34.04,65.28 0 bottom
LOGO8  QWIIC_LOGO_5MM  [QWIIC_5MM]  34.04,35.69 0 top
LOGO9  SFE_LOGO_NAME_FLAME.1_INCH  [SFE_LOGO_NAME_FLAME_.1]  34.04,39.45 0 top
LOGO10  QWIIC_LOGO_5MM  [QWIIC_5MM]  34.04,38.48 0 bottom
LOGO11  SFE_LOGO_NAME_FLAME.1_INCH  [SFE_LOGO_NAME_FLAME_.1]  52.32,42.32 0 bottom
LOGO12  OSHW-LOGOS  [OSHW-LOGO-S]  52.32,65.28 0 bottom
LOGO13  QWIIC_LOGO_5MM  [QWIIC_5MM]  52.32,35.69 0 top
LOGO14  SFE_LOGO_NAME_FLAME.1_INCH  [SFE_LOGO_NAME_FLAME_.1]  52.32,39.45 0 top
LOGO15  QWIIC_LOGO_5MM  [QWIIC_5MM]  52.32,38.48 0 bottom
LOGO16  SFE_LOGO_NAME_FLAME.1_INCH  [SFE_LOGO_NAME_FLAME_.1]  70.61,42.32 0 bottom
LOGO17  OSHW-LOGOS  [OSHW-LOGO-S]  70.61,65.28 0 bottom
LOGO18  QWIIC_LOGO_5MM  [QWIIC_5MM]  70.61,35.69 0 top
LOGO19  SFE_LOGO_NAME_FLAME.1_INCH  [SFE_LOGO_NAME_FLAME_.1]  70.61,39.45 0 top
LOGO20  QWIIC_LOGO_5MM  [QWIIC_5MM]  70.61,38.48 0 bottom
LOGO21  SFE_LOGO_NAME_FLAME.1_INCH  [SFE_LOGO_NAME_FLAME_.1]  88.9,42.32 0 bottom
LOGO22  OSHW-LOGOS  [OSHW-LOGO-S]  88.9,65.28 0 bottom
LOGO23  QWIIC_LOGO_5MM  [QWIIC_5MM]  88.9,35.69 0 top
LOGO24  SFE_LOGO_NAME_FLAME.1_INCH  [SFE_LOGO_NAME_FLAME_.1]  88.9,39.45 0 top
LOGO25  QWIIC_LOGO_5MM  [QWIIC_5MM]  88.9,38.48 0 bottom
LOGO26  SFE_LOGO_NAME_FLAME.1_INCH  [SFE_LOGO_NAME_FLAME_.1]  107.19,42.32 0 bottom
LOGO27  OSHW-LOGOS  [OSHW-LOGO-S]  107.19,65.28 0 bottom
LOGO28  QWIIC_LOGO_5MM  [QWIIC_5MM]  107.19,35.69 0 top
LOGO29  SFE_LOGO_NAME_FLAME.1_INCH  [SFE_LOGO_NAME_FLAME_.1]  107.19,39.45 0 top
LOGO30  QWIIC_LOGO_5MM  [QWIIC_5MM]  107.19,38.48 0 bottom
LOGO31  SFE_LOGO_NAME_FLAME.1_INCH  [SFE_LOGO_NAME_FLAME_.1]  125.48,42.32 0 bottom
LOGO32  OSHW-LOGOS  [OSHW-LOGO-S]  125.48,65.28 0 bottom
LOGO33  QWIIC_LOGO_5MM  [QWIIC_5MM]  125.48,35.69 0 top
LOGO34  SFE_LOGO_NAME_FLAME.1_INCH  [SFE_LOGO_NAME_FLAME_.1]  125.48,39.45 0 top
LOGO35  QWIIC_LOGO_5MM  [QWIIC_5MM]  125.48,38.48 0 bottom
LOGO36  SFE_LOGO_NAME_FLAME.1_INCH  [SFE_LOGO_NAME_FLAME_.1]  143.76,42.32 0 bottom
LOGO37  OSHW-LOGOS  [OSHW-LOGO-S]  143.76,65.28 0 bottom
LOGO38  QWIIC_LOGO_5MM  [QWIIC_5MM]  143.76,35.69 0 top
LOGO39  SFE_LOGO_NAME_FLAME.1_INCH  [SFE_LOGO_NAME_FLAME_.1]  143.76,39.45 0 top
LOGO40  QWIIC_LOGO_5MM  [QWIIC_5MM]  143.76,38.48 0 bottom
LOGO41  SFE_LOGO_NAME_FLAME.1_INCH  [SFE_LOGO_NAME_FLAME_.1]  162.05,42.32 0 bottom
LOGO42  OSHW-LOGOS  [OSHW-LOGO-S]  162.05,65.28 0 bottom
LOGO43  QWIIC_LOGO_5MM  [QWIIC_5MM]  162.05,35.69 0 top
LOGO44  SFE_LOGO_NAME_FLAME.1_INCH  [SFE_LOGO_NAME_FLAME_.1]  162.05,39.45 0 top
LOGO45  QWIIC_LOGO_5MM  [QWIIC_5MM]  162.05,38.48 0 bottom
LOGO46  SFE_LOGO_NAME_FLAME.1_INCH  [SFE_LOGO_NAME_FLAME_.1]  15.75,103.78 0 bottom
LOGO47  OSHW-LOGOS  [OSHW-LOGO-S]  15.75,126.75 0 bottom
LOGO48  QWIIC_LOGO_5MM  [QWIIC_5MM]  15.75,97.16 0 top
LOGO49  SFE_LOGO_NAME_FLAME.1_INCH  [SFE_LOGO_NAME_FLAME_.1]  15.75,100.91 0 top
LOGO50  QWIIC_LOGO_5MM  [QWIIC_5MM]  15.75,99.95 0 bottom
LOGO51  SFE_LOGO_NAME_FLAME.1_INCH  [SFE_LOGO_NAME_FLAME_.1]  34.04,103.78 0 bottom
LOGO52  OSHW-LOGOS  [OSHW-LOGO-S]  34.04,126.75 0 bottom
LOGO53  QWIIC_LOGO_5MM  [QWIIC_5MM]  34.04,97.16 0 top
LOGO54  SFE_LOGO_NAME_FLAME.1_INCH  [SFE_LOGO_NAME_FLAME_.1]  34.04,100.91 0 top
LOGO55  QWIIC_LOGO_5MM  [QWIIC_5MM]  34.04,99.95 0 bottom
LOGO56  SFE_LOGO_NAME_FLAME.1_INCH  [SFE_LOGO_NAME_FLAME_.1]  52.32,103.78 0 bottom
LOGO57  OSHW-LOGOS  [OSHW-LOGO-S]  52.32,126.75 0 bottom
LOGO58  QWIIC_LOGO_5MM  [QWIIC_5MM]  52.32,97.16 0 top
LOGO59  SFE_LOGO_NAME_FLAME.1_INCH  [SFE_LOGO_NAME_FLAME_.1]  52.32,100.91 0 top
LOGO60  QWIIC_LOGO_5MM  [QWIIC_5MM]  52.32,99.95 0 bottom
LOGO61  SFE_LOGO_NAME_FLAME.1_INCH  [SFE_LOGO_NAME_FLAME_.1]  70.61,103.78 0 bottom
LOGO62  OSHW-LOGOS  [OSHW-LOGO-S]  70.61,126.75 0 bottom
LOGO63  QWIIC_LOGO_5MM  [QWIIC_5MM]  70.61,97.16 0 top
LOGO64  SFE_LOGO_NAME_FLAME.1_INCH  [SFE_LOGO_NAME_FLAME_.1]  70.61,100.91 0 top
LOGO65  QWIIC_LOGO_5MM  [QWIIC_5MM]  70.61,99.95 0 bottom
LOGO66  SFE_LOGO_NAME_FLAME.1_INCH  [SFE_LOGO_NAME_FLAME_.1]  88.9,103.78 0 bottom
LOGO67  OSHW-LOGOS  [OSHW-LOGO-S]  88.9,126.75 0 bottom
LOGO68  QWIIC_LOGO_5MM  [QWIIC_5MM]  88.9,97.16 0 top
LOGO69  SFE_LOGO_NAME_FLAME.1_INCH  [SFE_LOGO_NAME_FLAME_.1]  88.9,100.91 0 top
LOGO70  QWIIC_LOGO_5MM  [QWIIC_5MM]  88.9,99.95 0 bottom
LOGO71  SFE_LOGO_NAME_FLAME.1_INCH  [SFE_LOGO_NAME_FLAME_.1]  107.19,103.78 0 bottom
LOGO72  OSHW-LOGOS  [OSHW-LOGO-S]  107.19,126.75 0 bottom
LOGO73  QWIIC_LOGO_5MM  [QWIIC_5MM]  107.19,97.16 0 top
LOGO74  SFE_LOGO_NAME_FLAME.1_INCH  [SFE_LOGO_NAME_FLAME_.1]  107.19,100.91 0 top
LOGO75  QWIIC_LOGO_5MM  [QWIIC_5MM]  107.19,99.95 0 bottom
LOGO76  SFE_LOGO_NAME_FLAME.1_INCH  [SFE_LOGO_NAME_FLAME_.1]  125.48,103.78 0 bottom
LOGO77  OSHW-LOGOS  [OSHW-LOGO-S]  125.48,126.75 0 bottom
LOGO78  QWIIC_LOGO_5MM  [QWIIC_5MM]  125.48,97.16 0 top
LOGO79  SFE_LOGO_NAME_FLAME.1_INCH  [SFE_LOGO_NAME_FLAME_.1]  125.48,100.91 0 top
LOGO80  QWIIC_LOGO_5MM  [QWIIC_5MM]  125.48,99.95 0 bottom
LOGO81  SFE_LOGO_NAME_FLAME.1_INCH  [SFE_LOGO_NAME_FLAME_.1]  143.76,103.78 0 bottom
LOGO82  OSHW-LOGOS  [OSHW-LOGO-S]  143.76,126.75 0 bottom
LOGO83  QWIIC_LOGO_5MM  [QWIIC_5MM]  143.76,97.16 0 top
LOGO84  SFE_LOGO_NAME_FLAME.1_INCH  [SFE_LOGO_NAME_FLAME_.1]  143.76,100.91 0 top
LOGO85  QWIIC_LOGO_5MM  [QWIIC_5MM]  143.76,99.95 0 bottom
LOGO86  SFE_LOGO_NAME_FLAME.1_INCH  [SFE_LOGO_NAME_FLAME_.1]  162.05,103.78 0 bottom
LOGO87  OSHW-LOGOS  [OSHW-LOGO-S]  162.05,126.75 0 bottom
LOGO88  QWIIC_LOGO_5MM  [QWIIC_5MM]  162.05,97.16 0 top
LOGO89  SFE_LOGO_NAME_FLAME.1_INCH  [SFE_LOGO_NAME_FLAME_.1]  162.05,100.91 0 top
LOGO90  QWIIC_LOGO_5MM  [QWIIC_5MM]  162.05,99.95 0 bottom
R1  4.7k  [0603]  29.26,59.66 270 top
R2  4.7k  [0603]  29.24,63.32 90 top
R3  4.7k  [0603]  10.97,59.66 270 top
R4  4.7k  [0603]  10.95,63.32 90 top
R5  4.7k  [0603]  47.55,59.66 270 top
R6  4.7k  [0603]  47.52,63.32 90 top
R7  4.7k  [0603]  65.84,59.66 270 top
R8  4.7k  [0603]  65.81,63.32 90 top
R9  4.7k  [0603]  84.12,59.66 270 top
R10  4.7k  [0603]  84.1,63.32 90 top
R11  4.7k  [0603]  102.41,59.66 270 top
R12  4.7k  [0603]  102.39,63.32 90 top
R13  4.7k  [0603]  120.7,59.66 270 top
R14  4.7k  [0603]  120.68,63.32 90 top
R15  4.7k  [0603]  138.99,59.66 270 top
R16  4.7k  [0603]  138.96,63.32 90 top
R17  4.7k  [0603]  157.28,59.66 270 top
R18  4.7k  [0603]  157.25,63.32 90 top
R19  4.7k  [0603]  10.97,121.13 270 top
R20  4.7k  [0603]  10.95,124.79 90 top
R21  4.7k  [0603]  29.26,121.13 270 top
R22  4.7k  [0603]  29.24,124.79 90 top
R23  4.7k  [0603]  47.55,121.13 270 top
R24  4.7k  [0603]  47.52,124.79 90 top
R25  4.7k  [0603]  65.84,121.13 270 top
R26  4.7k  [0603]  65.81,124.79 90 top
R27  4.7k  [0603]  84.12,121.13 270 top
R28  4.7k  [0603]  84.1,124.79 90 top
R29  4.7k  [0603]  102.41,121.13 270 top
R30  4.7k  [0603]  102.39,124.79 90 top
R31  4.7k  [0603]  120.7,121.13 270 top
R32  4.7k  [0603]  120.68,124.79 90 top
R33  4.7k  [0603]  138.99,121.13 270 top
R34  4.7k  [0603]  138.96,124.79 90 top
R35  4.7k  [0603]  157.28,121.13 270 top
R36  4.7k  [0603]  157.25,124.79 90 top
S1  SMD_5.2MM  [TACTILE_SWITCH_SMD_5.2MM]  15.75,48.77 0 top
S2  SMD_5.2MM  [TACTILE_SWITCH_SMD_5.2MM]  34.04,48.77 0 top
S3  SMD_5.2MM  [TACTILE_SWITCH_SMD_5.2MM]  52.32,48.77 0 top
S4  SMD_5.2MM  [TACTILE_SWITCH_SMD_5.2MM]  70.61,48.77 0 top
S5  SMD_5.2MM  [TACTILE_SWITCH_SMD_5.2MM]  88.9,48.77 0 top
S6  SMD_5.2MM  [TACTILE_SWITCH_SMD_5.2MM]  107.19,48.77 0 top
S7  SMD_5.2MM  [TACTILE_SWITCH_SMD_5.2MM]  125.48,48.77 0 top
S8  SMD_5.2MM  [TACTILE_SWITCH_SMD_5.2MM]  143.76,48.77 0 top
S9  SMD_5.2MM  [TACTILE_SWITCH_SMD_5.2MM]  162.05,48.77 0 top
S10  SMD_5.2MM  [TACTILE_SWITCH_SMD_5.2MM]  15.75,110.24 0 top
S11  SMD_5.2MM  [TACTILE_SWITCH_SMD_5.2MM]  34.04,110.24 0 top
S12  SMD_5.2MM  [TACTILE_SWITCH_SMD_5.2MM]  52.32,110.24 0 top
S13  SMD_5.2MM  [TACTILE_SWITCH_SMD_5.2MM]  70.61,110.24 0 top
S14  SMD_5.2MM  [TACTILE_SWITCH_SMD_5.2MM]  88.9,110.24 0 top
S15  SMD_5.2MM  [TACTILE_SWITCH_SMD_5.2MM]  107.19,110.24 0 top
S16  SMD_5.2MM  [TACTILE_SWITCH_SMD_5.2MM]  125.48,110.24 0 top
S17  SMD_5.2MM  [TACTILE_SWITCH_SMD_5.2MM]  143.76,110.24 0 top
S18  SMD_5.2MM  [TACTILE_SWITCH_SMD_5.2MM]  162.05,110.24 0 top
U$1  [#I2C#0]  11.58,62.76 90 bottom
U$2  [TEENSY0]  15.75,40.46 0 bottom
U$3  [3V36]  6.86,6.86 0 top
U$4  [#D1_BP#0]  10.85,16.38 90 bottom
U$5  [#ALT_3V3#0]  13.21,20.09 90 bottom
U$6  [#PRG#0]  15.85,45.67 0 top
U$7  [#GND#0]  15.75,18.36 90 bottom
U$8  [SHIELD0]  15.75,33.76 0 top
U$9  [#GND#0]  20.78,8.13 0 bottom
U$10  [#ISO#0]  14.38,10.57 0 bottom
U$11  [EXTENDED0]  15.75,32.11 0 top
U$12  [SHIELD0]  15.75,36.5 0 bottom
U$13  [TEENSY0]  15.75,37.59 0 top
U$14  [3V36]  25.15,6.86 0 top
U$15  [#3V3#0]  12.78,13.23 0 bottom
U$16  [EXTENDED0]  15.75,34.8 0 bottom
U$17  [TEENSY0]  34.04,37.59 0 top
U$18  [#SDA#0]  8.64,28.45 0 bottom
U$19  [#SCL#0]  8.61,25.93 0 bottom
U$20  [#3V3#0]  31.06,13.23 0 bottom
U$21  [#SDA#0]  26.92,28.45 0 bottom
U$22  [#SCL#0]  26.9,25.93 0 bottom
U$23  [#I2C#0]  29.87,62.76 90 bottom
U$24  [#D1_BP#0]  29.13,16.38 90 bottom
U$25  [#ALT_3V3#0]  31.5,20.09 90 bottom
U$26  [#GND#0]  34.04,18.36 90 bottom
U$27  [SHIELD0]  34.04,33.76 0 top
U$28  [#PRG#0]  34.14,45.67 0 top
U$29  [#ISO#0]  32.66,10.57 0 bottom
U$30  [TEENSY0]  34.04,40.46 0 bottom
U$31  [SHIELD0]  34.04,36.5 0 bottom
U$32  [#GND#0]  39.07,8.13 0 bottom
U$33  [EXTENDED0]  34.04,32.11 0 top
U$34  [EXTENDED0]  34.04,34.8 0 bottom
U$35  [3V36]  43.43,6.86 0 top
U$36  [TEENSY0]  52.32,37.59 0 top
U$37  [#3V3#0]  49.35,13.23 0 bottom
U$38  [#SDA#0]  45.21,28.45 0 bottom
U$39  [#SCL#0]  45.19,25.93 0 bottom
U$40  [#I2C#0]  48.16,62.76 90 bottom
U$41  [#D1_BP#0]  47.42,16.38 90 bottom
U$42  [#ALT_3V3#0]  49.78,20.09 90 bottom
U$43  [#GND#0]  52.32,18.36 90 bottom
U$44  [SHIELD0]  52.32,33.76 0 top
U$45  [#PRG#0]  52.43,45.67 0 top
U$46  [#ISO#0]  50.95,10.57 0 bottom
U$47  [TEENSY0]  52.32,40.46 0 bottom
U$48  [SHIELD0]  52.32,36.5 0 bottom
U$49  [#GND#0]  57.35,8.13 0 bottom
U$50  [EXTENDED0]  52.32,32.11 0 top
U$51  [EXTENDED0]  52.32,34.8 0 bottom
U$52  [3V36]  61.72,6.86 0 top
U$53  [TEENSY0]  70.61,37.59 0 top
U$54  [#3V3#0]  67.64,13.23 0 bottom
U$55  [#SDA#0]  63.5,28.45 0 bottom
U$56  [#SCL#0]  63.47,25.93 0 bottom
U$57  [#I2C#0]  66.45,62.76 90 bottom
U$58  [#D1_BP#0]  65.71,16.38 90 bottom
U$59  [#ALT_3V3#0]  68.07,20.09 90 bottom
U$60  [#GND#0]  70.61,18.36 90 bottom
U$61  [SHIELD0]  70.61,33.76 0 top
U$62  [#PRG#0]  70.71,45.67 0 top
U$63  [#ISO#0]  69.24,10.57 0 bottom
U$64  [TEENSY0]  70.61,40.46 0 bottom
U$65  [SHIELD0]  70.61,36.5 0 bottom
U$66  [#GND#0]  75.64,8.13 0 bottom
U$67  [EXTENDED0]  70.61,32.11 0 top
U$68  [EXTENDED0]  70.61,34.8 0 bottom
U$69  [3V36]  80.01,6.86 0 top
U$70  [TEENSY0]  88.9,37.59 0 top
U$71  [#3V3#0]  85.93,13.23 0 bottom
U$72  [#SDA#0]  81.79,28.45 0 bottom
U$73  [#SCL#0]  81.76,25.93 0 bottom
U$74  [#I2C#0]  84.73,62.76 90 bottom
U$75  [#D1_BP#0]  84,16.38 90 bottom
U$76  [#ALT_3V3#0]  86.36,20.09 90 bottom
U$77  [#GND#0]  88.9,18.36 90 bottom
U$78  [SHIELD0]  88.9,33.76 0 top
U$79  [#PRG#0]  89,45.67 0 top
U$80  [#ISO#0]  87.53,10.57 0 bottom
U$81  [TEENSY0]  88.9,40.46 0 bottom
U$82  [SHIELD0]  88.9,36.5 0 bottom
U$83  [#GND#0]  93.93,8.13 0 bottom
U$84  [EXTENDED0]  88.9,32.11 0 top
U$85  [EXTENDED0]  88.9,34.8 0 bottom
U$86  [3V36]  98.3,6.86 0 top
U$87  [TEENSY0]  107.19,37.59 0 top
U$88  [#3V3#0]  104.22,13.23 0 bottom
U$89  [#SDA#0]  100.08,28.45 0 bottom
U$90  [#SCL#0]  100.05,25.93 0 bottom
U$91  [#I2C#0]  103.02,62.76 90 bottom
U$92  [#D1_BP#0]  102.29,16.38 90 bottom
U$93  [#ALT_3V3#0]  104.65,20.09 90 bottom
U$94  [#GND#0]  107.19,18.36 90 bottom
U$95  [SHIELD0]  107.19,33.76 0 top
U$96  [#PRG#0]  107.29,45.67 0 top
U$97  [#ISO#0]  105.82,10.57 0 bottom
U$98  [TEENSY0]  107.19,40.46 0 bottom
U$99  [SHIELD0]  107.19,36.5 0 bottom
U$100  [#GND#0]  112.22,8.13 0 bottom
U$101  [EXTENDED0]  107.19,32.11 0 top
U$102  [EXTENDED0]  107.19,34.8 0 bottom
U$103  [3V36]  116.59,6.86 0 top
U$104  [TEENSY0]  125.48,37.59 0 top
U$105  [#3V3#0]  122.5,13.23 0 bottom
U$106  [#SDA#0]  118.36,28.45 0 bottom
U$107  [#SCL#0]  118.34,25.93 0 bottom
U$108  [#I2C#0]  121.31,62.76 90 bottom
U$109  [#D1_BP#0]  120.57,16.38 90 bottom
U$110  [#ALT_3V3#0]  122.94,20.09 90 bottom
U$111  [#GND#0]  125.48,18.36 90 bottom
U$112  [SHIELD0]  125.48,33.76 0 top
U$113  [#PRG#0]  125.58,45.67 0 top
U$114  [#ISO#0]  124.1,10.57 0 bottom
U$115  [TEENSY0]  125.48,40.46 0 bottom
U$116  [SHIELD0]  125.48,36.5 0 bottom
U$117  [#GND#0]  130.51,8.13 0 bottom
U$118  [EXTENDED0]  125.48,32.11 0 top
U$119  [EXTENDED0]  125.48,34.8 0 bottom
U$120  [3V36]  134.87,6.86 0 top
U$121  [TEENSY0]  143.76,37.59 0 top
U$122  [#3V3#0]  140.79,13.23 0 bottom
U$123  [#SDA#0]  136.65,28.45 0 bottom
U$124  [#SCL#0]  136.63,25.93 0 bottom
U$125  [#I2C#0]  139.6,62.76 90 bottom
U$126  [#D1_BP#0]  138.86,16.38 90 bottom
U$127  [#ALT_3V3#0]  141.22,20.09 90 bottom
U$128  [#GND#0]  143.76,18.36 90 bottom
U$129  [SHIELD0]  143.76,33.76 0 top
U$130  [#PRG#0]  143.87,45.67 0 top
U$131  [#ISO#0]  142.39,10.57 0 bottom
U$132  [TEENSY0]  143.76,40.46 0 bottom
U$133  [SHIELD0]  143.76,36.5 0 bottom
U$134  [#GND#0]  148.79,8.13 0 bottom
U$135  [EXTENDED0]  143.76,32.11 0 top
U$136  [EXTENDED0]  143.76,34.8 0 bottom
U$137  [3V36]  153.16,6.86 0 top
U$138  [TEENSY0]  162.05,37.59 0 top
U$139  [#3V3#0]  159.08,13.23 0 bottom
U$140  [#SDA#0]  154.94,28.45 0 bottom
U$141  [#SCL#0]  154.91,25.93 0 bottom
U$142  [#I2C#0]  157.89,62.76 90 bottom
U$143  [#D1_BP#0]  157.15,16.38 90 bottom
U$144  [#ALT_3V3#0]  159.51,20.09 90 bottom
U$145  [#GND#0]  162.05,18.36 90 bottom
U$146  [SHIELD0]  162.05,33.76 0 top
U$147  [#PRG#0]  162.15,45.67 0 top
U$148  [#ISO#0]  160.68,10.57 0 bottom
U$149  [TEENSY0]  162.05,40.46 0 bottom
U$150  [SHIELD0]  162.05,36.5 0 bottom
U$151  [#GND#0]  167.08,8.13 0 bottom
U$152  [EXTENDED0]  162.05,32.11 0 top
U$153  [EXTENDED0]  162.05,34.8 0 bottom
U$154  [3V36]  6.86,68.33 0 top
U$155  [TEENSY0]  15.75,99.06 0 top
U$156  [#3V3#0]  12.78,74.7 0 bottom
U$157  [#SDA#0]  8.64,89.92 0 bottom
U$158  [#SCL#0]  8.61,87.4 0 bottom
U$159  [#I2C#0]  11.58,124.23 90 bottom
U$160  [#D1_BP#0]  10.85,77.85 90 bottom
U$161  [#ALT_3V3#0]  13.21,81.56 90 bottom
U$162  [#GND#0]  15.75,79.83 90 bottom
U$163  [SHIELD0]  15.75,95.22 0 top
U$164  [#PRG#0]  15.85,107.14 0 top
U$165  [#ISO#0]  14.38,72.03 0 bottom
U$166  [TEENSY0]  15.75,101.93 0 bottom
U$167  [SHIELD0]  15.75,97.97 0 bottom
U$168  [#GND#0]  20.78,69.6 0 bottom
U$169  [EXTENDED0]  15.75,93.57 0 top
U$170  [EXTENDED0]  15.75,96.27 0 bottom
U$171  [3V36]  25.15,68.33 0 top
U$172  [TEENSY0]  34.04,99.06 0 top
U$173  [#3V3#0]  31.06,74.7 0 bottom
U$174  [#SDA#0]  26.92,89.92 0 bottom
U$175  [#SCL#0]  26.9,87.4 0 bottom
U$176  [#I2C#0]  29.87,124.23 90 bottom
U$177  [#D1_BP#0]  29.13,77.85 90 bottom
U$178  [#ALT_3V3#0]  31.5,81.56 90 bottom
U$179  [#GND#0]  34.04,79.83 90 bottom
U$180  [SHIELD0]  34.04,95.22 0 top
U$181  [#PRG#0]  34.14,107.14 0 top
U$182  [#ISO#0]  32.66,72.03 0 bottom
U$183  [TEENSY0]  34.04,101.93 0 bottom
U$184  [SHIELD0]  34.04,97.97 0 bottom
U$185  [#GND#0]  39.07,69.6 0 bottom
U$186  [EXTENDED0]  34.04,93.57 0 top
U$187  [EXTENDED0]  34.04,96.27 0 bottom
U$188  [3V36]  43.43,68.33 0 top
U$189  [TEENSY0]  52.32,99.06 0 top
U$190  [#3V3#0]  49.35,74.7 0 bottom
U$191  [#SDA#0]  45.21,89.92 0 bottom
U$192  [#SCL#0]  45.19,87.4 0 bottom
U$193  [#I2C#0]  48.16,124.23 90 bottom
U$194  [#D1_BP#0]  47.42,77.85 90 bottom
U$195  [#ALT_3V3#0]  49.78,81.56 90 bottom
U$196  [#GND#0]  52.32,79.83 90 bottom
U$197  [SHIELD0]  52.32,95.22 0 top
U$198  [#PRG#0]  52.43,107.14 0 top
U$199  [#ISO#0]  50.95,72.03 0 bottom
U$200  [TEENSY0]  52.32,101.93 0 bottom
U$201  [SHIELD0]  52.32,97.97 0 bottom
U$202  [#GND#0]  57.35,69.6 0 bottom
U$203  [EXTENDED0]  52.32,93.57 0 top
U$204  [EXTENDED0]  52.32,96.27 0 bottom
U$205  [3V36]  61.72,68.33 0 top
U$206  [TEENSY0]  70.61,99.06 0 top
U$207  [#3V3#0]  67.64,74.7 0 bottom
U$208  [#SDA#0]  63.5,89.92 0 bottom
U$209  [#SCL#0]  63.47,87.4 0 bottom
U$210  [#I2C#0]  66.45,124.23 90 bottom
U$211  [#D1_BP#0]  65.71,77.85 90 bottom
U$212  [#ALT_3V3#0]  68.07,81.56 90 bottom
U$213  [#GND#0]  70.61,79.83 90 bottom
U$214  [SHIELD0]  70.61,95.22 0 top
U$215  [#PRG#0]  70.71,107.14 0 top
U$216  [#ISO#0]  69.24,72.03 0 bottom
U$217  [TEENSY0]  70.61,101.93 0 bottom
U$218  [SHIELD0]  70.61,97.97 0 bottom
U$219  [#GND#0]  75.64,69.6 0 bottom
U$220  [EXTENDED0]  70.61,93.57 0 top
U$221  [EXTENDED0]  70.61,96.27 0 bottom
U$222  [3V36]  80.01,68.33 0 top
U$223  [TEENSY0]  88.9,99.06 0 top
U$224  [#3V3#0]  85.93,74.7 0 bottom
U$225  [#SDA#0]  81.79,89.92 0 bottom
U$226  [#SCL#0]  81.76,87.4 0 bottom
U$227  [#I2C#0]  84.73,124.23 90 bottom
U$228  [#D1_BP#0]  84,77.85 90 bottom
U$229  [#ALT_3V3#0]  86.36,81.56 90 bottom
U$230  [#GND#0]  88.9,79.83 90 bottom
U$231  [SHIELD0]  88.9,95.22 0 top
U$232  [#PRG#0]  89,107.14 0 top
U$233  [#ISO#0]  87.53,72.03 0 bottom
U$234  [TEENSY0]  88.9,101.93 0 bottom
U$235  [SHIELD0]  88.9,97.97 0 bottom
U$236  [#GND#0]  93.93,69.6 0 bottom
U$237  [EXTENDED0]  88.9,93.57 0 top
U$238  [EXTENDED0]  88.9,96.27 0 bottom
U$239  [3V36]  98.3,68.33 0 top
U$240  [TEENSY0]  107.19,99.06 0 top
U$241  [#3V3#0]  104.22,74.7 0 bottom
U$242  [#SDA#0]  100.08,89.92 0 bottom
U$243  [#SCL#0]  100.05,87.4 0 bottom
U$244  [#I2C#0]  103.02,124.23 90 bottom
U$245  [#D1_BP#0]  102.29,77.85 90 bottom
U$246  [#ALT_3V3#0]  104.65,81.56 90 bottom
U$247  [#GND#0]  107.19,79.83 90 bottom
U$248  [SHIELD0]  107.19,95.22 0 top
U$249  [#PRG#0]  107.29,107.14 0 top
U$250  [#ISO#0]  105.82,72.03 0 bottom
U$251  [TEENSY0]  107.19,101.93 0 bottom
U$252  [SHIELD0]  107.19,97.97 0 bottom
U$253  [#GND#0]  112.22,69.6 0 bottom
U$254  [EXTENDED0]  107.19,93.57 0 top
U$255  [EXTENDED0]  107.19,96.27 0 bottom
U$256  [3V36]  116.59,68.33 0 top
U$257  [TEENSY0]  125.48,99.06 0 top
U$258  [#3V3#0]  122.5,74.7 0 bottom
U$259  [#SDA#0]  118.36,89.92 0 bottom
U$260  [#SCL#0]  118.34,87.4 0 bottom
U$261  [#I2C#0]  121.31,124.23 90 bottom
U$262  [#D1_BP#0]  120.57,77.85 90 bottom
U$263  [#ALT_3V3#0]  122.94,81.56 90 bottom
U$264  [#GND#0]  125.48,79.83 90 bottom
U$265  [SHIELD0]  125.48,95.22 0 top
U$266  [#PRG#0]  125.58,107.14 0 top
U$267  [#ISO#0]  124.1,72.03 0 bottom
U$268  [TEENSY0]  125.48,101.93 0 bottom
U$269  [SHIELD0]  125.48,97.97 0 bottom
U$270  [#GND#0]  130.51,69.6 0 bottom
U$271  [EXTENDED0]  125.48,93.57 0 top
U$272  [EXTENDED0]  125.48,96.27 0 bottom
U$273  [3V36]  134.87,68.33 0 top
U$274  [TEENSY0]  143.76,99.06 0 top
U$275  [#3V3#0]  140.79,74.7 0 bottom
U$276  [#SDA#0]  136.65,89.92 0 bottom
U$277  [#SCL#0]  136.63,87.4 0 bottom
U$278  [#I2C#0]  139.6,124.23 90 bottom
U$279  [#D1_BP#0]  138.86,77.85 90 bottom
U$280  [#ALT_3V3#0]  141.22,81.56 90 bottom
U$281  [#GND#0]  143.76,79.83 90 bottom
U$282  [SHIELD0]  143.76,95.22 0 top
U$283  [#PRG#0]  143.87,107.14 0 top
U$284  [#ISO#0]  142.39,72.03 0 bottom
U$285  [TEENSY0]  143.76,101.93 0 bottom
U$286  [SHIELD0]  143.76,97.97 0 bottom
U$287  [#GND#0]  148.79,69.6 0 bottom
U$288  [EXTENDED0]  143.76,93.57 0 top
U$289  [EXTENDED0]  143.76,96.27 0 bottom
U$290  [3V36]  153.16,68.33 0 top
U$291  [TEENSY0]  162.05,99.06 0 top
U$292  [#3V3#0]  159.08,74.7 0 bottom
U$293  [#SDA#0]  154.94,89.92 0 bottom
U$294  [#SCL#0]  154.91,87.4 0 bottom
U$295  [#I2C#0]  157.89,124.23 90 bottom
U$296  [#D1_BP#0]  157.15,77.85 90 bottom
U$297  [#ALT_3V3#0]  159.51,81.56 90 bottom
U$298  [#GND#0]  162.05,79.83 90 bottom
U$299  [SHIELD0]  162.05,95.22 0 top
U$300  [#PRG#0]  162.15,107.14 0 top
U$301  [#ISO#0]  160.68,72.03 0 bottom
U$302  [TEENSY0]  162.05,101.93 0 bottom
U$303  [SHIELD0]  162.05,97.97 0 bottom
U$304  [#GND#0]  167.08,69.6 0 bottom
U$305  [EXTENDED0]  162.05,93.57 0 top
U$306  [EXTENDED0]  162.05,96.27 0 bottom

## Library data of the parts
3V3_ISO 3V3_ISO1-3V3_ISO17 D1_BP D1_BP1-D1_BP17 I2C I2C1-I2C17 = SparkFun-Jumpers
D1-D18 = SparkFun-DiscreteSemi; PROD_ID: DIO-14072
E$1-E$4 FD1-FD72 LOGO1-LOGO90 = SparkFun-Aesthetics
E$5 E$6 = SparkFun-Retired
J1 J11 J17 J23 J29 J35 J41 J47 J53 J59 J65 J71 J77 J83 J89 J95 J101 J107 = teensy_boards
J2 J3 J7 J8 J13 J14 J19 J20 J25 J26 J31 J32 J37 J38 J43 J44 J49 J50 J55 J56 J61 J62 J67 J68 J73 J74 J79 J80 J85 J86 J91 J92 J97 J98 J103 J104 = SparkFun-Connectors; PROD_ID: CONN-13694
J4 J5 J9 J12 J15 J18 J21 J24 J27 J30 J33 J36 J39 J42 J45 J48 J51 J54 J57 J60 J63 J66 J69 J72 J75 J78 J81 J84 J87 J90 J93 J96 J99 J102 J105 J108 = SparkFun-Connectors; PROD_ID: CONN-14483
J6 J10 J16 J22 J28 J34 J40 J46 J52 J58 J64 J70 J76 J82 J88 J94 J100 J106 = SparkFun-Connectors
R1-R36 = SparkFun-Resistors; PROD_ID: RES-07857
S1-S18 = SparkFun-Switches; PROD_ID: SWCH-14139
U$1 U$2 U$4-U$13 U$15-U$34 U$36-U$51 U$53-U$68 U$70-U$85 U$87-U$102 U$104-U$119 U$121-U$136 U$138-U$153 U$155-U$170 U$172-U$187 U$189-U$204 U$206-U$221 U$223-U$238 U$240-U$255 U$257-U$272 U$274-U$289 U$291-U$306 = output
U$3 U$14 U$35 U$52 U$69 U$86 U$103 U$120 U$137 U$154 U$171 U$188 U$205 U$222 U$239 U$256 U$273 U$290 = buzzard_labels (24)

## Nets
3.3V: 3V3_ISO.1 D1.C D1_BP.2 I2C.2 J2.2 J3.2 J4.2 J5.2
3.3V1: 3V3_ISO1.1 D1_BP1.2 D2.C I2C1.2 J7.2 J8.2 J9.2 J12.2
3.3V2: 3V3_ISO2.1 D1_BP2.2 D3.C I2C2.2 J13.2 J14.2 J15.2 J18.2
3.3V3: 3V3_ISO3.1 D1_BP3.2 D4.C I2C3.2 J19.2 J20.2 J21.2 J24.2
3.3V4: 3V3_ISO4.1 D1_BP4.2 D5.C I2C4.2 J25.2 J26.2 J27.2 J30.2
3.3V5: 3V3_ISO5.1 D1_BP5.2 D6.C I2C5.2 J31.2 J32.2 J33.2 J36.2
3.3V6: 3V3_ISO6.1 D1_BP6.2 D7.C I2C6.2 J37.2 J38.2 J39.2 J42.2
3.3V7: 3V3_ISO7.1 D1_BP7.2 D8.C I2C7.2 J43.2 J44.2 J45.2 J48.2
3.3V8: 3V3_ISO8.1 D1_BP8.2 D9.C I2C8.2 J49.2 J50.2 J51.2 J54.2
3.3V9: 3V3_ISO9.1 D1_BP9.2 D10.C I2C9.2 J55.2 J56.2 J57.2 J60.2
3.3V10: 3V3_ISO10.1 D1_BP10.2 D11.C I2C10.2 J61.2 J62.2 J63.2 J66.2
3.3V11: 3V3_ISO11.1 D1_BP11.2 D12.C I2C11.2 J67.2 J68.2 J69.2 J72.2
3.3V12: 3V3_ISO12.1 D1_BP12.2 D13.C I2C12.2 J73.2 J74.2 J75.2 J78.2
3.3V13: 3V3_ISO13.1 D1_BP13.2 D14.C I2C13.2 J79.2 J80.2 J81.2 J84.2
3.3V14: 3V3_ISO14.1 D1_BP14.2 D15.C I2C14.2 J85.2 J86.2 J87.2 J90.2
3.3V15: 3V3_ISO15.1 D1_BP15.2 D16.C I2C15.2 J91.2 J92.2 J93.2 J96.2
3.3V16: 3V3_ISO16.1 D1_BP16.2 D17.C I2C16.2 J97.2 J98.2 J99.2 J102.2
3.3V17: 3V3_ISO17.1 D1_BP17.2 D18.C I2C17.2 J103.2 J104.2 J105.2 J108.2
3.3V_1: J1.3.3V@1
3.3V_2: J1.3.3V@2
3.3V_3: J11.3.3V@2
3.3V_4: J11.3.3V@1
3.3V_5: J17.3.3V@2
3.3V_6: J17.3.3V@1
3.3V_7: J23.3.3V@2
3.3V_8: J23.3.3V@1
3.3V_9: J29.3.3V@2
3.3V_10: J29.3.3V@1
3.3V_11: J35.3.3V@2
3.3V_12: J35.3.3V@1
3.3V_13: J41.3.3V@2
3.3V_14: J41.3.3V@1
3.3V_15: J47.3.3V@2
3.3V_16: J47.3.3V@1
3.3V_17: J53.3.3V@2
3.3V_18: J53.3.3V@1
3.3V_19: J59.3.3V@2
3.3V_20: J59.3.3V@1
3.3V_21: J65.3.3V@2
3.3V_22: J65.3.3V@1
3.3V_23: J71.3.3V@2
3.3V_24: J71.3.3V@1
3.3V_25: J77.3.3V@2
3.3V_26: J77.3.3V@1
3.3V_27: J83.3.3V@2
3.3V_28: J83.3.3V@1
3.3V_29: J89.3.3V@2
3.3V_30: J89.3.3V@1
3.3V_31: J95.3.3V@2
3.3V_32: J95.3.3V@1
3.3V_33: J101.3.3V@2
3.3V_34: J101.3.3V@1
3.3V_35: J107.3.3V@2
3.3V_36: J107.3.3V@1
5V: J1.5V
5V1: J11.5V
5V2: J17.5V
5V3: J23.5V
5V4: J29.5V
5V5: J35.5V
5V6: J41.5V
5V7: J47.5V
5V8: J53.5V
5V9: J59.5V
5V10: J65.5V
5V11: J71.5V
5V12: J77.5V
5V13: J83.5V
5V14: J89.5V
5V15: J95.5V
5V16: J101.5V
5V17: J107.5V
D+: J1.D+
D+1: J11.D+
D+2: J17.D+
D+3: J23.D+
D+4: J29.D+
D+5: J35.D+
D+6: J41.D+
D+7: J47.D+
D+8: J53.D+
D+9: J59.D+
D+10: J65.D+
D+11: J71.D+
D+12: J77.D+
D+13: J83.D+
D+14: J89.D+
D+15: J95.D+
D+16: J101.D+
D+17: J107.D+
D-: J1.D-
D-1: J11.D-
D-2: J17.D-
D-3: J23.D-
D-4: J29.D-
D-5: J35.D-
D-6: J41.D-
D-7: J47.D-
D-8: J53.D-
D-9: J59.D-
D-10: J65.D-
D-11: J71.D-
D-12: J77.D-
D-13: J83.D-
D-14: J89.D-
D-15: J95.D-
D-16: J101.D-
D-17: J107.D-
GND: J1.AGND J1.GND J1.GND1 J1.GND2 J1.GND3 J1.GND4 J2.1 J3.1 J4.1 J5.1 J6.1 S1.3
GND1: J7.1 J8.1 J9.1 J10.1 J11.AGND J11.GND J11.GND1 J11.GND2 J11.GND3 J11.GND4 J12.1 S2.3
GND2: J13.1 J14.1 J15.1 J16.1 J17.AGND J17.GND J17.GND1 J17.GND2 J17.GND3 J17.GND4 J18.1 S3.3
GND3: J19.1 J20.1 J21.1 J22.1 J23.AGND J23.GND J23.GND1 J23.GND2 J23.GND3 J23.GND4 J24.1 S4.3
GND4: J25.1 J26.1 J27.1 J28.1 J29.AGND J29.GND J29.GND1 J29.GND2 J29.GND3 J29.GND4 J30.1 S5.3
GND5: J31.1 J32.1 J33.1 J34.1 J35.AGND J35.GND J35.GND1 J35.GND2 J35.GND3 J35.GND4 J36.1 S6.3
GND6: J37.1 J38.1 J39.1 J40.1 J41.AGND J41.GND J41.GND1 J41.GND2 J41.GND3 J41.GND4 J42.1 S7.3
GND7: J43.1 J44.1 J45.1 J46.1 J47.AGND J47.GND J47.GND1 J47.GND2 J47.GND3 J47.GND4 J48.1 S8.3
GND8: J49.1 J50.1 J51.1 J52.1 J53.AGND J53.GND J53.GND1 J53.GND2 J53.GND3 J53.GND4 J54.1 S9.3
GND9: J55.1 J56.1 J57.1 J58.1 J59.AGND J59.GND J59.GND1 J59.GND2 J59.GND3 J59.GND4 J60.1 S10.3
GND10: J61.1 J62.1 J63.1 J64.1 J65.AGND J65.GND J65.GND1 J65.GND2 J65.GND3 J65.GND4 J66.1 S11.3
GND11: J67.1 J68.1 J69.1 J70.1 J71.AGND J71.GND J71.GND1 J71.GND2 J71.GND3 J71.GND4 J72.1 S12.3
GND12: J73.1 J74.1 J75.1 J76.1 J77.AGND J77.GND J77.GND1 J77.GND2 J77.GND3 J77.GND4 J78.1 S13.3
GND13: J79.1 J80.1 J81.1 J82.1 J83.AGND J83.GND J83.GND1 J83.GND2 J83.GND3 J83.GND4 J84.1 S14.3
GND14: J85.1 J86.1 J87.1 J88.1 J89.AGND J89.GND J89.GND1 J89.GND2 J89.GND3 J89.GND4 J90.1 S15.3
GND15: J91.1 J92.1 J93.1 J94.1 J95.AGND J95.GND J95.GND1 J95.GND2 J95.GND3 J95.GND4 J96.1 S16.3
GND16: J97.1 J98.1 J99.1 J100.1 J101.AGND J101.GND J101.GND1 J101.GND2 J101.GND3 J101.GND4 J102.1 S17.3
GND17: J103.1 J104.1 J105.1 J106.1 J107.AGND J107.GND J107.GND1 J107.GND2 J107.GND3 J107.GND4 J108.1 S18.3
N$1: I2C.3 R4.2
N$2: I2C.1 R3.2
N$3: 3V3_ISO.2 J1.3V
N$4: D1.A D1_BP.1 J6.2
N$5: J1.PROG S1.1
N$6: I2C1.3 R2.2
N$7: I2C1.1 R1.2
N$8: D1_BP1.1 D2.A J10.2
N$9: J11.PROG S2.1
N$10: 3V3_ISO1.2 J11.3V
N$11: I2C2.3 R6.2
N$12: I2C2.1 R5.2
N$13: D1_BP2.1 D3.A J16.2
N$14: J17.PROG S3.1
N$15: 3V3_ISO2.2 J17.3V
N$16: I2C3.3 R8.2
N$17: I2C3.1 R7.2
N$18: D1_BP3.1 D4.A J22.2
N$19: J23.PROG S4.1
N$20: 3V3_ISO3.2 J23.3V
N$21: I2C4.3 R10.2
N$22: I2C4.1 R9.2
N$23: D1_BP4.1 D5.A J28.2
N$24: J29.PROG S5.1
N$25: 3V3_ISO4.2 J29.3V
N$26: I2C5.3 R12.2
N$27: I2C5.1 R11.2
N$28: D1_BP5.1 D6.A J34.2
N$29: J35.PROG S6.1
N$30: 3V3_ISO5.2 J35.3V
N$31: I2C6.3 R14.2
N$32: I2C6.1 R13.2
N$33: D1_BP6.1 D7.A J40.2
N$34: J41.PROG S7.1
N$35: 3V3_ISO6.2 J41.3V
N$36: I2C7.3 R16.2
N$37: I2C7.1 R15.2
N$38: D1_BP7.1 D8.A J46.2
N$39: J47.PROG S8.1
N$40: 3V3_ISO7.2 J47.3V
N$41: I2C8.3 R18.2
N$42: I2C8.1 R17.2
N$43: D1_BP8.1 D9.A J52.2
N$44: J53.PROG S9.1
N$45: 3V3_ISO8.2 J53.3V
N$46: I2C9.3 R20.2
N$47: I2C9.1 R19.2
N$48: D1_BP9.1 D10.A J58.2
N$49: J59.PROG S10.1
N$50: 3V3_ISO9.2 J59.3V
N$51: I2C10.3 R22.2
N$52: I2C10.1 R21.2
N$53: D1_BP10.1 D11.A J64.2
N$54: J65.PROG S11.1
N$55: 3V3_ISO10.2 J65.3V
N$56: I2C11.3 R24.2
N$57: I2C11.1 R23.2
N$58: D1_BP11.1 D12.A J70.2
N$59: J71.PROG S12.1
N$60: 3V3_ISO11.2 J71.3V
N$61: I2C12.3 R26.2
N$62: I2C12.1 R25.2
N$63: D1_BP12.1 D13.A J76.2
N$64: J77.PROG S13.1
N$65: 3V3_ISO12.2 J77.3V
N$66: I2C13.3 R28.2
N$67: I2C13.1 R27.2
N$68: D1_BP13.1 D14.A J82.2
N$69: J83.PROG S14.1
N$70: 3V3_ISO13.2 J83.3V
N$71: I2C14.3 R30.2
N$72: I2C14.1 R29.2
N$73: D1_BP14.1 D15.A J88.2
N$74: J89.PROG S15.1
N$75: 3V3_ISO14.2 J89.3V
N$76: I2C15.3 R32.2
N$77: I2C15.1 R31.2
N$78: D1_BP15.1 D16.A J94.2
N$79: J95.PROG S16.1
N$80: 3V3_ISO15.2 J95.3V
N$81: I2C16.3 R34.2
N$82: I2C16.1 R33.2
N$83: D1_BP16.1 D17.A J100.2
N$84: J101.PROG S17.1
N$85: 3V3_ISO16.2 J101.3V
N$86: I2C17.3 R36.2
N$87: I2C17.1 R35.2
N$88: D1_BP17.1 D18.A J106.2
N$89: J107.PROG S18.1
N$90: 3V3_ISO17.2 J107.3V
SCL: J1.19 J2.4 J3.4 J4.4 J5.4 R3.1
SCL1: J7.4 J8.4 J9.4 J11.19 J12.4 R1.1
SCL2: J13.4 J14.4 J15.4 J17.19 J18.4 R5.1
SCL3: J19.4 J20.4 J21.4 J23.19 J24.4 R7.1
SCL4: J25.4 J26.4 J27.4 J29.19 J30.4 R9.1
SCL5: J31.4 J32.4 J33.4 J35.19 J36.4 R11.1
SCL6: J37.4 J38.4 J39.4 J41.19 J42.4 R13.1
SCL7: J43.4 J44.4 J45.4 J47.19 J48.4 R15.1
SCL8: J49.4 J50.4 J51.4 J53.19 J54.4 R17.1
SCL9: J55.4 J56.4 J57.4 J59.19 J60.4 R19.1
SCL10: J61.4 J62.4 J63.4 J65.19 J66.4 R21.1
SCL11: J67.4 J68.4 J69.4 J71.19 J72.4 R23.1
SCL12: J73.4 J74.4 J75.4 J77.19 J78.4 R25.1
SCL13: J79.4 J80.4 J81.4 J83.19 J84.4 R27.1
SCL14: J85.4 J86.4 J87.4 J89.19 J90.4 R29.1
SCL15: J91.4 J92.4 J93.4 J95.19 J96.4 R31.1
SCL16: J97.4 J98.4 J99.4 J101.19 J102.4 R33.1
SCL17: J103.4 J104.4 J105.4 J107.19 J108.4 R35.1
SDA: J1.18 J2.3 J3.3 J4.3 J5.3 R4.1
SDA1: J7.3 J8.3 J9.3 J11.18 J12.3 R2.1
SDA2: J13.3 J14.3 J15.3 J17.18 J18.3 R6.1
SDA3: J19.3 J20.3 J21.3 J23.18 J24.3 R8.1
SDA4: J25.3 J26.3 J27.3 J29.18 J30.3 R10.1
SDA5: J31.3 J32.3 J33.3 J35.18 J36.3 R12.1
SDA6: J37.3 J38.3 J39.3 J41.18 J42.3 R14.1
SDA7: J43.3 J44.3 J45.3 J47.18 J48.3 R16.1
SDA8: J49.3 J50.3 J51.3 J53.18 J54.3 R18.1
SDA9: J55.3 J56.3 J57.3 J59.18 J60.3 R20.1
SDA10: J61.3 J62.3 J63.3 J65.18 J66.3 R22.1
SDA11: J67.3 J68.3 J69.3 J71.18 J72.3 R24.1
SDA12: J73.3 J74.3 J75.3 J77.18 J78.3 R26.1
SDA13: J79.3 J80.3 J81.3 J83.18 J84.3 R28.1
SDA14: J85.3 J86.3 J87.3 J89.18 J90.3 R30.1
SDA15: J91.3 J92.3 J93.3 J95.18 J96.3 R32.1
SDA16: J97.3 J98.3 J99.3 J101.18 J102.3 R34.1
SDA17: J103.3 J104.3 J105.3 J107.18 J108.3 R36.1
VBAT: J1.VBAT
VBAT1: J11.VBAT
VBAT2: J17.VBAT
VBAT3: J23.VBAT
VBAT4: J29.VBAT
VBAT5: J35.VBAT
VBAT6: J41.VBAT
VBAT7: J47.VBAT
VBAT8: J53.VBAT
VBAT9: J59.VBAT
VBAT10: J65.VBAT
VBAT11: J71.VBAT
VBAT12: J77.VBAT
VBAT13: J83.VBAT
VBAT14: J89.VBAT
VBAT15: J95.VBAT
VBAT16: J101.VBAT
VBAT17: J107.VBAT
VIN: J1.VIN
VIN1: J11.VIN
VIN2: J17.VIN
VIN3: J23.VIN
VIN4: J29.VIN
VIN5: J35.VIN
VIN6: J41.VIN
VIN7: J47.VIN
VIN8: J53.VIN
VIN9: J59.VIN
VIN10: J65.VIN
VIN11: J71.VIN
VIN12: J77.VIN
VIN13: J83.VIN
VIN14: J89.VIN
VIN15: J95.VIN
VIN16: J101.VIN
VIN17: J107.VIN